# Allegro board FLASHLIGHT_V23.brd
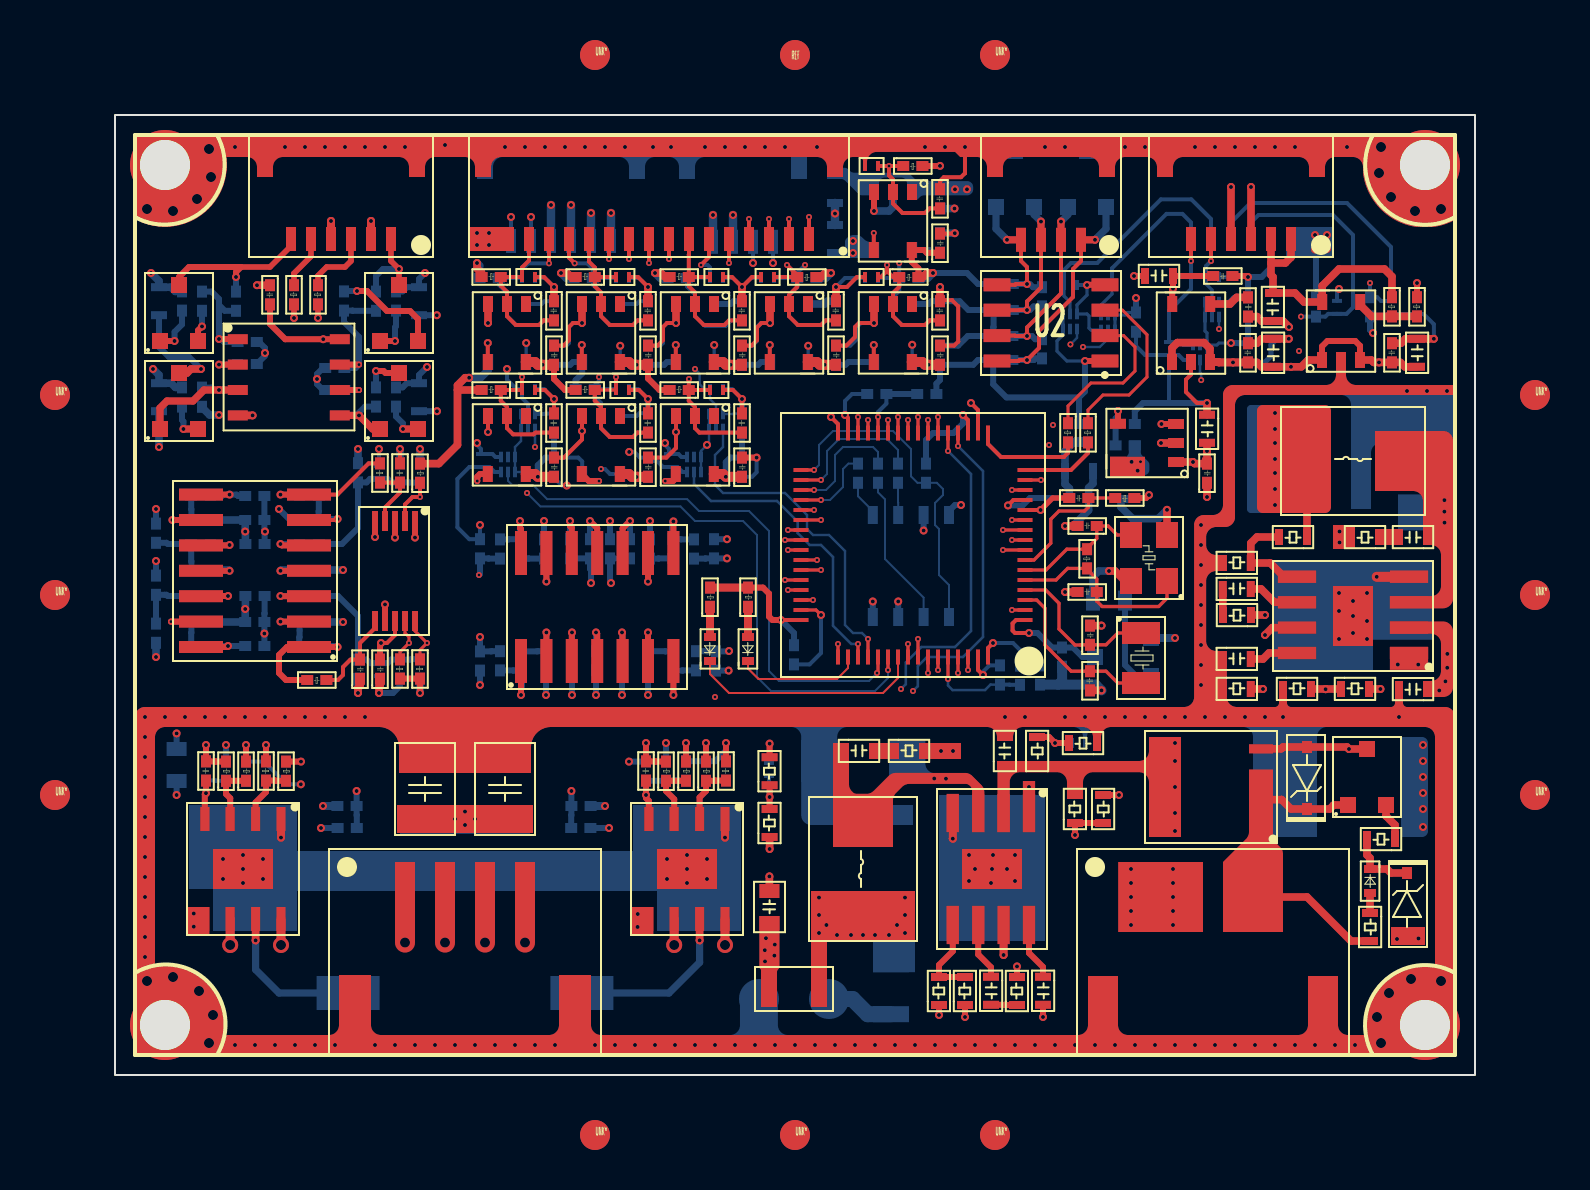
[diagram p0: board, top side]
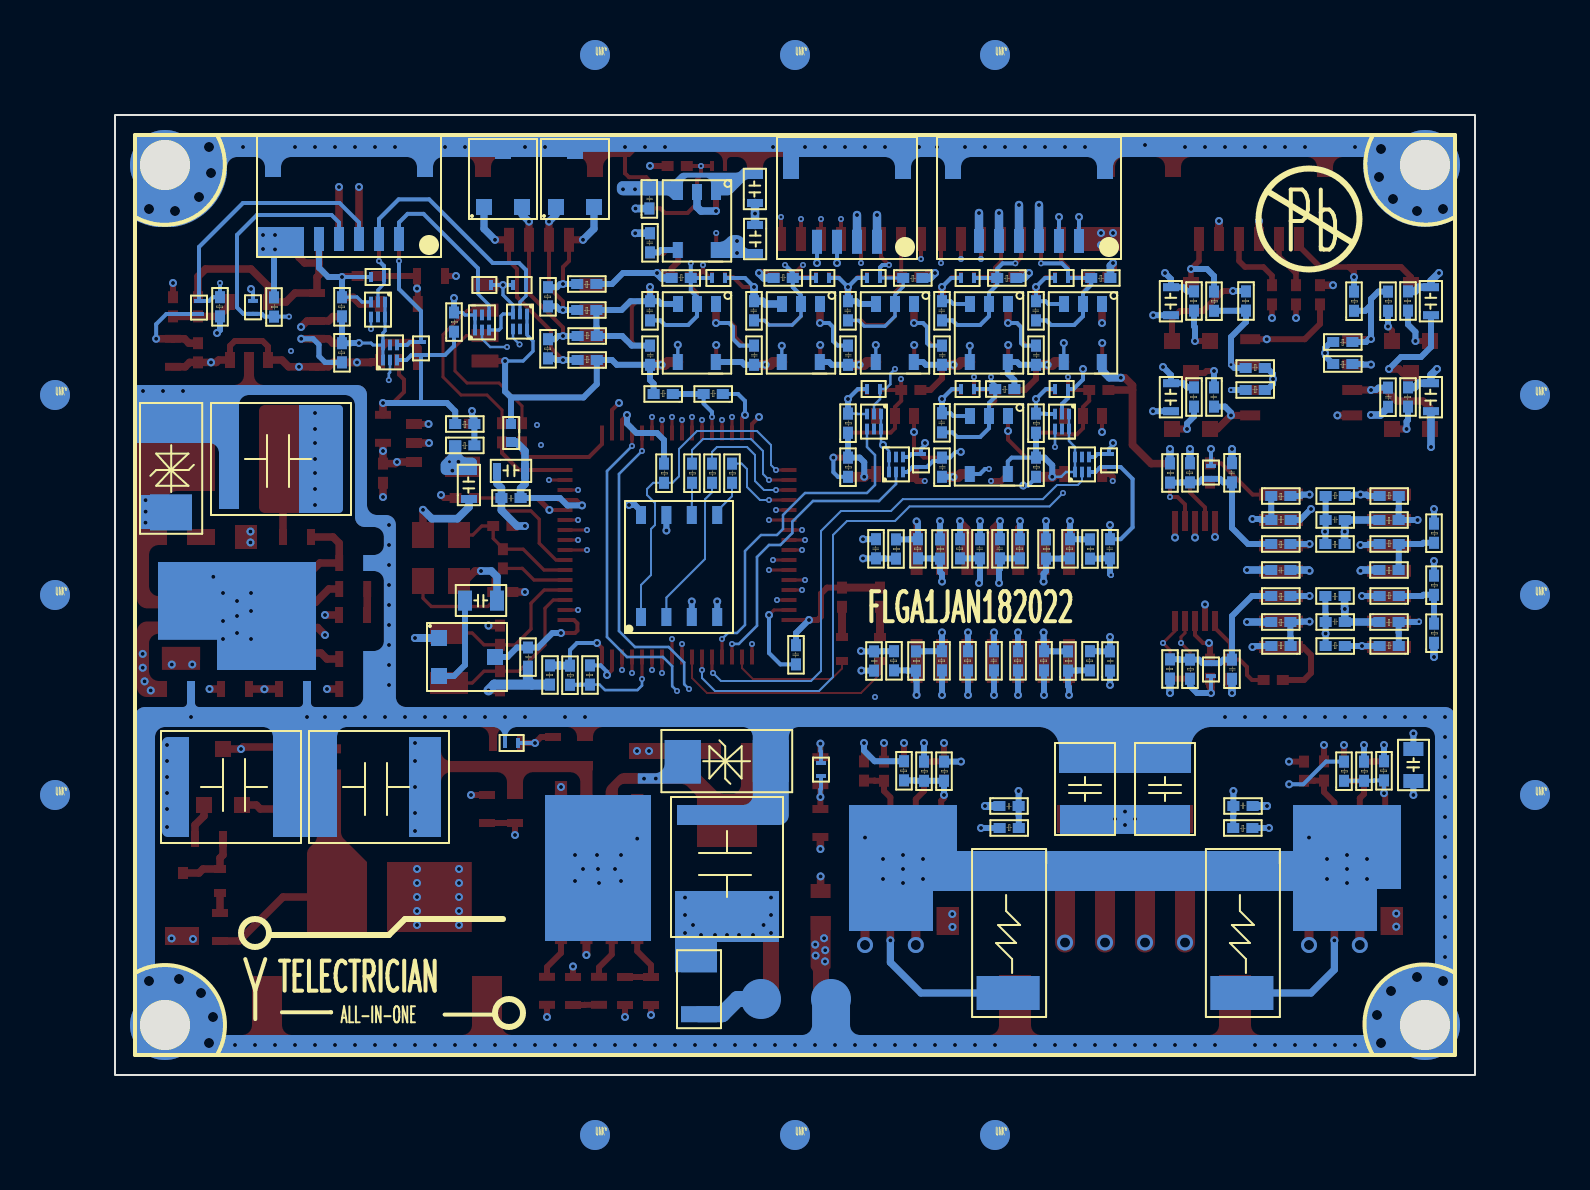
[diagram p1: board, bottom side, seen from below]

Outline 68 x 48 mm; copper layers: TOP, GND-2, SIGNAL-3, VCC-4, GND-5, SIGNAL-6, GND-7, BOTTOM. Coordinates in mm from the lower left corner of the outline.
Outline path: rectangle 0,0 68,48

## Design rules (mm)
constraint set DEFAULT: min track width 0.1

## Placement (name value [footprint] x y rotation side)
BT1  CR1220-3V  [C0805]  50.7 23.1 180 bottom
C1  0.1uF  [C0402]  41 44.3 270 top
C2  0.1uF  [C0402]  41.5 41.1 90 top
C3  10uF  [C0603]  51.4 39.55 0 top
C4  0.1uF  [C0402]  54.9 39.7 0 top
C5  0.1uF  [C0402]  7.5 39.5 270 top
C6  0.1uF  [C0402]  56.9 37.91 90 top
C7  10uF  [C0603]  58.3 37.6 90 top
C8  0.1uF  [C0402]  21.7 38.7 270 top
C9  0.1uF  [C0402]  26.4 38.7 270 top
C10  0.1uF  [C0402]  31.1 38.7 270 top
C11  0.1uF  [C0402]  35.8 38.7 270 top
C12  0.1uF  [C0402]  41 38.7 270 top
C13  0.1uF  [C0402]  56.4 36.6 270 top
C14  4.7uF  [C0603]  57.5 36.91 270 top
C15  0.1uF  [C0402]  63.6 36.6 270 top
C16  4.7uF  [C0603]  64.7 36.91 270 top
C17  0.1uF  [C0402]  22.2 35.5 90 top
C18  0.1uF  [C0402]  26.9 35.5 90 top
C19  0.1uF  [C0402]  31.6 35.5 90 top
C20  0.1uF  [C0402]  36.3 35.5 90 top
C21  0.1uF  [C0402]  41.5 35.5 90 top
C22  0.1uF  [C0402]  21.7 33.09 270 top
C23  0.1uF  [C0402]  26.4 33.09 270 top
C24  0.1uF  [C0402]  31.1 33.09 270 top
C25  4.7uF  [C0603]  54.2 33.11 270 top
C26  0.1uF  [C0402]  22.2 29.9 90 top
C27  0.1uF  [C0402]  26.9 29.9 90 top
C28  0.1uF  [C0402]  31.6 29.9 90 top
C29  0.1uF  [C0402]  14 30.59 270 top
C30  0.1uF  [C0402]  54.85 29.6 90 top
C31  0.1uF  [C0402]  47.7 28.6 0 top
C32  22pF  [C0402]  49.1 27.7 180 top
C33  10nF  [C0603]  65.7 27.3 180 top
C34  5.6nF  [C0603]  55.29 23.9 0 top
C35  22pF  [C0402]  49.1 24.4 180 top
C36  22pF  [C0402]  49 21.5 90 top
C37  0.1uF  [C0603]  55.29 20.4 0 top
C38  0.1uF  [C0402]  12.5 19.8 90 top
C39  0.1uF  [C0402]  13.5 19.8 90 top
C40  22pF  [C0402]  48.5 20.2 270 top
C41  0.1uF  [C0603]  65.7 19.7 180 top
C42  0.1uF  [C0603]  44.9 15.4 90 top
C43  10nF  [C0603]  36.4 15.8 0 top
C44  0.1uF  [C0402]  4.3 15.69 270 top
C45  0.1uF  [C0402]  26.3 15.69 270 top
C46  10uF  [C1210]  15.5 12.9 90 top
C47  10uF  [C1210]  19.5 12.9 90 top
C48  10uF  [C0805]  32.1 9.4 270 top
C49  5.6nF  [C0603]  43.4 5.01 270 top
C50  0.1uF  [C0603]  46 5.01 270 top
C51  4.7uF  [C0603]  35.6 43.5 90 bottom
C52  0.1uF  [C0402]  41.03 43.31 90 bottom
C53  10uF  [C0603]  36.4 42.6 270 bottom
C54  0.1uF  [C0402]  41.5 42.1 270 bottom
C55  10uF  [C0603]  14.8 37.89 90 bottom
C56  10uF  [C0603]  1.8 37.89 90 bottom
C57  0.1uF  [R0402]  56.9 38.9 270 bottom
C58  0.1uF  [C0402]  41.5 38.7 270 bottom
C59  0.1uF  [C0402]  36.3 38.7 270 bottom
C60  0.1uF  [C0402]  31.6 38.7 270 bottom
C61  0.1uF  [C0402]  26.9 38.7 270 bottom
C62  0.1uF  [C0402]  22.2 38.7 270 bottom
C63  0.1uF  [R0402]  50.8 37.16 90 bottom
C64  0.1uF  [R0402]  56.9 36.6 270 bottom
C65  0.1uF  [C0402]  41 35.5 90 bottom
C66  0.1uF  [C0402]  35.8 35.5 90 bottom
C67  0.1uF  [C0402]  31.1 35.5 90 bottom
C68  0.1uF  [C0402]  26.4 35.5 90 bottom
C69  0.1uF  [C0402]  21.7 35.5 90 bottom
C70  10uF  [C0603]  14.8 33.09 90 bottom
C71  0.1uF  [C0402]  13.3 34.39 270 bottom
C72  0.1uF  [C0402]  4.1 33.4 90 bottom
C73  10uF  [C0603]  1.8 33.09 90 bottom
C74  0.1uF  [C0402]  26.9 33.1 270 bottom
C75  0.1uF  [R0402]  31.1 32.1 90 bottom
C76  0.1uF  [R0402]  21.7 32.1 90 bottom
C77  47uF  [C2220]  62.3 30.8 180 bottom
C78  0.1uF  [R0402]  31.1 29.9 90 bottom
C79  0.1uF  [C0402]  26.4 29.9 90 bottom
C80  0.1uF  [R0402]  21.7 29.9 90 bottom
C81  10uF  [C0603]  49 29.8 180 bottom
C82  0.1uF  [C0402]  12.4 30.6 270 bottom
C83  10uF  [C0603]  49.9 28.7 90 bottom
C84  0.1uF  [C0402]  48.69 28.6 180 bottom
C85  0.1uF  [C0402]  6.5 28 0 bottom
C86  0.1uF  [C0402]  30.2 26.8 270 bottom
C87  0.1uF  [C0402]  25 26.8 270 bottom
C88  0.1uF  [C0402]  24 26.8 270 bottom
C89  0.1uF  [C0402]  18.5 26.8 270 bottom
C90  0.1uF  [C0402]  10.2 25 180 bottom
C91  0.1uF  [C0402]  6.5 22.9 0 bottom
C92  0.1uF  [C0402]  34.2 21.5 270 bottom
C93  0.1uF  [C0402]  47.1 20.41 90 bottom
C94  0.1uF  [C0402]  29.8 20.21 90 bottom
C95  0.1uF  [C0402]  24.3 21.2 270 bottom
C96  0.1uF  [C0402]  18 20.21 90 bottom
C97  0.1uF  [C0402]  11.9 19.8 90 bottom
C98  0.1uF  [R0402]  46.5 20.49 270 bottom
C99  10uF  [C0805]  3.7 16.5 270 bottom
C100  47uF  [C2220]  59.6 14.4 0 bottom
C101  47uF  [C2220]  57.4 14.4 180 bottom
C102  10uF  [C1210]  19.5 12.9 90 bottom
C103  10uF  [C1210]  15.5 12.9 90 bottom
C104  0.1uF  [C0402]  23.79 13.2 180 bottom
C105  0.1uF  [C0402]  11.11 13.7 0 bottom
C106  47uF  [C2220]  37.4 13 270 bottom
D1  ESD4.5V88D-C  [DFN-1006DN]  37.5 45.45 0 top
D2  ESD4.5V88D-C  [DFN-1006DN]  21 39.9 180 top
D3  ESD4.5V88D-C  [DFN-1006DN]  25.7 39.9 180 top
D4  ESD4.5V88D-C  [DFN-1006DN]  30.4 39.9 180 top
D5  ESD4.5V88D-C  [DFN-1006DN]  32.3 39.9 0 top
D6  ESD4.5V88D-C  [DFN-1006DN]  37.5 39.9 0 top
D7  ESD4.5V88D-C  [DFN-1006DN]  21 34.25 180 top
D8  ESD4.5V88D-C  [DFN-1006DN]  25.7 34.25 180 top
D9  ESD4.5V88D-C  [DFN-1006DN]  30.4 34.25 180 top
D10  BLUE  [LED0402]  30 20.8 90 top
D11  BLUE  [LED0402]  31.9 20.8 90 top
D12  BZT52C5V1  [SOD-123]  59.6 13.3 90 top
D13  RED  [LED0402]  62.5 10.2 270 top
D14  BZT52C36V  [SOD-123]  64.6 10.1 270 top
D15  ESD4.5V88D-C  [DFN-1006DN]  55.2 39.9 180 bottom
D16  ESD4.5V88D-C  [DFN-1006DN]  37.5 39.85 0 bottom
D17  ESD4.5V88D-C  [DFN-1006DN]  32.3 39.85 0 bottom
D18  ESD4.5V88D-C  [DFN-1006DN]  30.4 39.85 180 bottom
D19  ESD4.5V88D-C  [DFN-1006DN]  25.7 39.85 180 bottom
D20  ESD4.5V88D-C  [DFN-1006DN]  21 39.85 180 bottom
D21  ESD4.5V88D-C  [DFN-1006DN]  49.2 39.5 0 bottom
D22  ESD4.5V88D-C  [DFN-1006DN]  48.1 39.5 180 bottom
D23  ESD4.5V88D-C  [DFN-1006DN]  61.1 38.05 90 bottom
D24  ESD4.5V88D-C  [DFN-1006DN]  63.8 38.7 270 bottom
D25  ESD4.5V88D-C  [DFN-1006DN]  52.7 36 90 bottom
D26  ESD4.5V88D-C  [DFN-1006DN]  30.4 34.3 180 bottom
D27  ESD4.5V88D-C  [DFN-1006DN]  25.7 34.3 180 bottom
D28  ESD4.5V88D-C  [DFN-1006DN]  21 34.3 180 bottom
D29  ESD4.5V88D-C  [DFN-1006DN]  27.7 30.4 90 bottom
D30  ESD4.5V88D-C  [DFN-1006DN]  18.3 30.4 90 bottom
D31  SS35  [DO-214AC]  63.8 28 90 bottom
D32  ESD4.5V88D-C  [DFN-1006DN]  13.2 30.45 270 bottom
D33  ESD4.5V88D-C  [DFN-1006DN]  13.2 19.95 90 bottom
D34  ESD4.5V88D-C  [DFN-1006DN]  48.5 16.6 180 bottom
D35  SS35  [DO-214AC]  39.74 14.3 180 bottom
D36  ESD4.5V88D-C  [DFN-1006DN]  32.7 15.6 270 bottom
J1  Header1x6  [SMD-SH1D0-6P-HOR]  11.3 42.5 180 top
J2  Header1x16  [SMD-SH1D0-16P-HOR]  27.2 42.5 180 top
J3  Header1x4  [SMD-SH1D0-4P-HOR]  46.8 42.5 180 top
J4  Header1x6  [SMD-SH1D0-6P-HOR]  56.3 42.5 180 top
J5  Header1x4  [SMD-PH2D0-4P-HOR]  17.5 7 0 top
J6  Header1x4  [SMD-PH2D0-4P-HOR]  54.9 7 0 top
J7  Header1x6  [SMD-SH1D0-6P-HOR]  56.3 42.5 0 bottom
J8  Header1x4  [SMD-SH1D0-4P-HOR]  31.4 42.4 0 bottom
J9  Header1x6  [SMD-SH1D0-6P-HOR]  22.3 42.4 0 bottom
L1  10uH  [IND-5D7X5D2X1D8]  64 30.7 180 top
L2  10uH  [IND-5D7X5D2X1D8]  37.4 12.4 270 top
L3  1uH  [L1206]  35.2 4.3 180 top
L4  BLM15BD182SN1D  [FB0402]  48.44 32.6 270 bottom
L5  1uH  [L1206]  38.8 5.54 270 bottom
NOREF  -  []  54.2 31.51 0 top
NOREF#2  -  []  38.9 44.15 0 top
NOREF#3  -  []  27.27 40.29 0 top
NOREF#4  -  []  30.96 36.93 0 top
NOREF#5  -  []  27.04 31.67 90 top
NOREF#6  -  []  12.86 29.16 0 top
NOREF#7  -  []  29 38.55 0 top
NOREF#8  -  []  40.63 39.46 90 top
NOREF#9  -  []  22.57 33.86 90 top
NOREF#10  -  []  6.16 14.25 90 top
NOREF#11  -  []  29.66 21.64 0 top
NOREF#12  -  []  18.05 35.5 90 top
NOREF#13  -  []  32.76 35.65 90 top
NOREF#14  -  []  67.3 27.3 90 top
NOREF#15  -  []  38.76 29.15 90 top
NOREF#16  -  []  22.34 37.27 90 top
NOREF#17  -  []  47.67 23.76 90 top
NOREF#18  -  []  49.57 31.09 90 top
NOREF#19  -  []  50.3 35 90 top
NOREF#20  -  []  26.26 36.93 0 top
NOREF#21  -  []  30.14 22.95 90 top
NOREF#22  -  []  3.74 37.76 90 top
NOREF#23  -  []  18.65 38.55 0 top
NOREF#24  -  []  30.55 35.5 90 top
NOREF#25  -  []  47.26 28.46 0 top
NOREF#26  -  []  26.36 25.36 90 top
NOREF#27  -  []  5.23 21.06 90 top
NOREF#28  -  []  46.51 15.4 90 top
NOREF#29  -  []  10.67 11.96 0 top
NOREF#30  -  []  28.24 25.37 90 top
NOREF#31  -  []  21.56 35.05 90 top
NOREF#32  -  []  3.35 26.94 0 top
NOREF#33  -  []  48.22 24.87 90 top
NOREF#34  -  []  43.47 37.86 90 top
NOREF#35  -  []  64.7 35.31 0 top
NOREF#36  -  []  35.66 36.93 0 top
NOREF#37  -  []  30.96 36.93 0 top
NOREF#38  -  []  25.24 30.05 90 top
NOREF#39  -  []  3.36 27.36 0 top
NOREF#40  -  []  55.29 21.21 0 top
NOREF#41  -  []  26.14 25.37 90 top
NOREF#42  -  []  11.76 29.17 0 top
NOREF#43  -  []  6.16 16.13 0 top
NOREF#44  -  []  50 30.05 90 top
NOREF#45  -  []  35.53 39.51 90 top
NOREF#46  -  []  8.77 22.26 90 top
NOREF#47  -  []  44.64 19.06 90 top
NOREF#48  -  []  41.67 44.74 90 top
NOREF#49  -  []  57.49 37.6 90 top
NOREF#50  -  []  40.86 36.93 0 top
NOREF#51  -  []  3.36 22.26 0 top
NOREF#52  -  []  19.64 19.77 90 top
NOREF#53  -  []  40.9 42.86 90 top
NOREF#54  -  []  55.3 22.59 0 top
NOREF#55  -  []  27.46 25.37 0 top
NOREF#56  -  []  14.44 37.76 90 top
NOREF#57  -  []  27.45 29.9 0 top
NOREF#58  -  []  17.87 33.86 90 top
NOREF#59  -  []  14.8 39.49 0 top
NOREF#60  -  []  40.86 37.27 0 top
NOREF#61  -  []  33.65 40.24 0 top
NOREF#62  -  []  30.96 37.27 0 top
NOREF#63  -  []  44.1 40.2 0 top
NOREF#64  -  []  3.7 14.5 90 top
NOREF#65  -  []  33.65 39.51 0 top
NOREF#66  -  []  53 39.55 90 top
NOREF#67  -  []  44.09 17 0 top
NOREF#68  -  []  30.96 31.66 0 top
NOREF#69  -  []  41.53 33.66 90 top
NOREF#70  -  []  30.96 31.33 0 top
NOREF#71  -  []  50.66 38.59 0 top
NOREF#72  -  []  21.56 31.65 90 top
NOREF#73  -  []  46.81 3.41 90 top
NOREF#74  -  []  48.36 22.93 0 top
NOREF#75  -  []  57.04 37.46 90 top
NOREF#76  -  []  27.94 14.25 90 top
NOREF#77  -  []  19.86 25.37 0 top
NOREF#78  -  []  5.66 37.75 90 top
NOREF#79  -  []  9.76 38.07 0 top
NOREF#80  -  []  8.16 16.13 0 top
NOREF#81  -  []  32.1 7.4 90 top
NOREF#82  -  []  44.69 3.4 90 top
NOREF#83  -  []  0 -7.51 0 top
NOREF#84  -  []  27.17 39.46 90 top
NOREF#85  -  []  68 -7.81 0 top
NOREF#86  -  []  28.94 14.27 90 top
NOREF#87  -  []  5.23 23.56 90 top
NOREF#88  -  []  54.21 31.03 90 top
NOREF#89  -  []  17.86 21.64 0 top
NOREF#90  -  []  5.67 36.26 0 top
NOREF#91  -  []  31.74 29.45 90 top
NOREF#92  -  []  23.35 32.95 0 top
NOREF#93  -  []  39.03 33.66 90 top
NOREF#94  -  []  13.86 29.16 90 top
NOREF#95  -  []  32.15 35.5 0 top
NOREF#96  -  []  40.16 29.15 90 top
NOREF#97  -  []  56.33 39.56 90 top
NOREF#98  -  []  22.57 40.29 0 top
NOREF#99  -  []  8.94 14.25 90 top
NOREF#100  -  []  30.96 37.27 0 top
NOREF#101  -  []  36.41 43.5 90 top
NOREF#102  -  []  10.64 21.06 90 top
NOREF#103  -  []  37.35 35.5 0 top
NOREF#104  -  []  63.46 35.17 0 top
NOREF#105  -  []  21.56 31.33 0 top
NOREF#106  -  []  9.15 19.36 0 top
NOREF#107  -  []  52.85 35.65 0 top
NOREF#108  -  []  36.76 31.03 0 top
NOREF#109  -  []  10.05 35.74 0 top
NOREF#110  -  []  2.96 32.96 0 top
NOREF#111  -  []  6.05 23.04 0 top
NOREF#112  -  []  23.14 25.37 90 top
NOREF#113  -  []  8.77 26.16 0 top
NOREF#114  -  []  38.75 40.24 0 top
NOREF#115  -  []  40.79 5 0 top
NOREF#116  -  []  -5 -5 90 top
NOREF#117  -  []  37.15 34.44 0 top
NOREF#118  -  []  37.96 35.65 90 top
NOREF#119  -  []  21.56 31.66 90 top
NOREF#120  -  []  6.16 16.13 0 top
NOREF#121  -  []  28.94 14.25 90 top
NOREF#122  -  []  5.94 14.25 90 top
NOREF#123  -  []  48.36 18.77 0 top
NOREF#124  -  []  3.36 22.26 90 top
NOREF#125  -  []  5.16 14.25 90 top
NOREF#126  -  []  57.5 35.31 0 top
NOREF#127  -  []  4.94 14.27 90 top
NOREF#128  -  []  15.61 37.89 90 top
NOREF#129  -  []  32.75 38.55 0 top
NOREF#130  -  []  57.04 35.17 90 top
NOREF#131  -  []  30.16 14.26 90 top
NOREF#132  -  []  21.56 37.27 90 top
NOREF#133  -  []  22.57 33.91 90 top
NOREF#134  -  []  62.85 35.6 90 top
NOREF#135  -  []  7.93 28.56 90 top
NOREF#136  -  []  11.8 32.4 90 top
NOREF#137  -  []  47.67 27.06 90 top
NOREF#138  -  []  17.77 39.46 0 top
NOREF#139  -  []  52.85 35.65 90 top
NOREF#140  -  []  64.71 37.47 90 top
NOREF#141  -  []  47.4 29.8 90 top
NOREF#142  -  []  23.66 19.77 0 top
NOREF#143  -  []  56.1 22.3 90 top
NOREF#144  -  []  63.8 32.6 0 top
NOREF#145  -  []  41.64 40.65 90 top
NOREF#146  -  []  8.56 38.07 0 top
NOREF#147  -  []  45 5.01 90 top
NOREF#148  -  []  2.5 2.5 90 top
NOREF#149  -  []  11.84 37.76 90 top
NOREF#150  -  []  47.25 28.46 0 top
NOREF#151  -  []  22.75 35.5 90 top
NOREF#152  -  []  6.05 21.84 0 top
NOREF#153  -  []  40.83 45.06 90 top
NOREF#154  -  []  22.75 35.5 0 top
NOREF#155  -  []  33.35 7.4 90 top
NOREF#156  -  []  3.96 32.95 90 top
NOREF#157  -  []  21.56 33.53 0 top
NOREF#158  -  []  42.09 5 0 top
NOREF#159  -  []  7.93 27.36 90 top
NOREF#160  -  []  18.05 29.9 0 top
NOREF#161  -  []  25.74 19.77 90 top
NOREF#162  -  []  15.64 29.15 90 top
NOREF#163  -  []  26.26 19.77 0 top
NOREF#164  -  []  62.5 11.39 0 top
NOREF#165  -  []  18.64 25.37 90 top
NOREF#166  -  []  46.74 35.37 90 top
NOREF#167  -  []  10.64 27.36 90 top
NOREF#168  -  []  52.25 38.7 0 top
NOREF#169  -  []  26.26 31.67 0 top
NOREF#170  -  []  32.32 13.4 0 top
NOREF#171  -  []  40.45 41.1 90 top
NOREF#172  -  []  17.86 25.37 0 top
NOREF#173  -  []  32.04 22.95 90 top
NOREF#174  -  []  51.43 28.46 90 top
NOREF#175  -  []  6.94 14.25 90 top
NOREF#176  -  []  27.45 35.5 0 top
NOREF#177  -  []  61.7 26.49 0 top
NOREF#178  -  []  47.26 31.17 90 top
NOREF#179  -  []  59.9 18.9 90 top
NOREF#180  -  []  40.63 39.51 90 top
NOREF#181  -  []  2.45 14.5 90 top
NOREF#182  -  []  30.96 31.33 0 top
NOREF#183  -  []  46.64 19.06 90 top
NOREF#184  -  []  14.8 34.69 0 top
NOREF#185  -  []  22.36 13.06 90 top
NOREF#186  -  []  65.51 35.31 90 top
NOREF#187  -  []  1.66 25.43 0 top
NOREF#188  -  []  61.2 19.71 0 top
NOREF#189  -  []  38.75 39.51 0 top
NOREF#190  -  []  34 0 90 top
NOREF#191  -  []  20.54 30.05 90 top
NOREF#192  -  []  5.23 26.16 90 top
NOREF#193  -  []  46.74 35.37 90 top
NOREF#194  -  []  26.26 31.33 0 top
NOREF#195  -  []  21.56 37.27 0 top
NOREF#196  -  []  22.57 33.91 0 top
NOREF#197  -  []  40.86 42.87 90 top
NOREF#198  -  []  20.64 25.37 90 top
NOREF#199  -  []  27.27 39.51 90 top
NOREF#200  -  []  8.56 38.07 90 top
NOREF#201  -  []  14.44 32.96 90 top
NOREF#202  -  []  1.8 39.49 0 top
NOREF#203  -  []  29 32.95 0 top
NOREF#204  -  []  5.66 39.63 0 top
NOREF#205  -  []  58.1 26.49 90 top
NOREF#206  -  []  29.94 35.65 90 top
NOREF#207  -  []  24.3 32.95 0 top
NOREF#208  -  []  62.35 6.6 0 top
NOREF#209  -  []  8.76 21.84 0 top
NOREF#210  -  []  2.96 37.76 0 top
NOREF#211  -  []  11.76 21.23 0 top
NOREF#212  -  []  26.26 31.66 90 top
NOREF#213  -  []  22.46 19.77 0 top
NOREF#214  -  []  26.26 31.66 90 top
NOREF#215  -  []  28.56 27.24 0 top
NOREF#216  -  []  63.46 37.47 90 top
NOREF#217  -  []  11.93 34.96 90 top
NOREF#218  -  []  8.77 23.56 90 top
NOREF#219  -  []  18.86 27.24 0 top
NOREF#220  -  []  5.16 16.13 0 top
NOREF#221  -  []  2.5 45.5 0 top
NOREF#222  -  []  44.69 5 0 top
NOREF#223  -  []  26.16 14.26 0 top
NOREF#224  -  []  49.57 31.09 0 top
NOREF#225  -  []  12.86 21.23 0 top
NOREF#226  -  []  45.33 35.36 90 top
NOREF#227  -  []  1.66 23.03 0 top
NOREF#228  -  []  3.96 37.75 90 top
NOREF#229  -  []  30.96 37.27 90 top
NOREF#230  -  []  38 15.8 90 top
NOREF#231  -  []  30.16 14.26 0 top
NOREF#232  -  []  10.05 34.64 0 top
NOREF#233  -  []  14.86 19.36 0 top
NOREF#234  -  []  22.36 13.06 0 top
NOREF#235  -  []  47.26 31.17 0 top
NOREF#236  -  []  50 33.15 0 top
NOREF#237  -  []  66.59 28 90 top
NOREF#238  -  []  60.35 35.75 90 top
NOREF#239  -  []  19.6 32.95 0 top
NOREF#240  -  []  24.36 25.37 0 top
NOREF#241  -  []  49.9 30.3 0 top
NOREF#242  -  []  20.54 35.65 90 top
NOREF#243  -  []  6.06 26.16 0 top
NOREF#244  -  []  28.16 14.27 0 top
NOREF#245  -  []  49.57 32.16 90 top
NOREF#246  -  []  29.66 19.76 90 top
NOREF#247  -  []  48.26 31.17 90 top
NOREF#248  -  []  75.42 0 0 top
NOREF#249  -  []  8.77 24.86 0 top
NOREF#250  -  []  21.56 36.93 0 top
NOREF#251  -  []  30.96 33.53 0 top
NOREF#252  -  []  7.93 22.26 90 top
NOREF#253  -  []  56.26 35.17 0 top
NOREF#254  -  []  33.56 20.07 0 top
NOREF#255  -  []  56.89 25.2 90 top
NOREF#256  -  []  63.16 6.6 90 top
NOREF#257  -  []  26.26 37.27 90 top
NOREF#258  -  []  43.4 5.82 0 top
NOREF#259  -  []  18.05 35.5 0 top
NOREF#260  -  []  27.17 39.46 0 top
NOREF#261  -  []  37.35 41.1 90 top
NOREF#262  -  []  32.32 14.39 90 top
NOREF#263  -  []  37.76 31.03 0 top
NOREF#264  -  []  29.94 14.25 90 top
NOREF#265  -  []  3.96 34.83 0 top
NOREF#266  -  []  25.14 25.37 90 top
NOREF#267  -  []  5.23 28.56 90 top
NOREF#268  -  []  28.06 35.65 90 top
NOREF#269  -  []  14.64 29.17 90 top
NOREF#270  -  []  50.7 21.1 90 top
NOREF#271  -  []  26.26 36.93 0 top
NOREF#272  -  []  35.66 37.27 90 top
NOREF#273  -  []  75.29 48 0 top
NOREF#274  -  []  6.05 28.14 0 top
NOREF#275  -  []  31.74 35.05 90 top
NOREF#276  -  []  27.04 29.45 90 top
NOREF#277  -  []  21.56 36.93 0 top
NOREF#278  -  []  46.96 19.95 90 top
NOREF#279  -  []  24.44 19.77 90 top
NOREF#280  -  []  55.3 22.59 90 top
NOREF#281  -  []  23.14 25.37 90 top
NOREF#282  -  []  22.57 39.51 90 top
NOREF#283  -  []  40.79 3.4 90 top
NOREF#284  -  []  56.89 20.4 90 top
NOREF#285  -  []  37.35 41.1 0 top
NOREF#286  -  []  12.86 29.16 90 top
NOREF#287  -  []  55.01 31.51 90 top
NOREF#288  -  []  21.16 19.77 0 top
NOREF#289  -  []  22.34 29.45 90 top
NOREF#290  -  []  41.64 35.05 90 top
NOREF#291  -  []  1.8 34.69 0 top
NOREF#292  -  []  56.26 35.17 90 top
NOREF#293  -  []  21.56 31.33 0 top
NOREF#294  -  []  6.05 29.34 0 top
NOREF#295  -  []  56.89 19.71 90 top
NOREF#296  -  []  5.67 35.16 90 top
NOREF#297  -  []  37.95 38.55 0 top
NOREF#298  -  []  32.15 35.5 0 top
NOREF#299  -  []  17.87 40.29 0 top
NOREF#300  -  []  27.45 29.9 90 top
NOREF#301  -  []  46.96 21.84 0 top
NOREF#302  -  []  44.1 35.7 0 top
NOREF#303  -  []  58.3 19.71 0 top
NOREF#304  -  []  49.14 21.05 90 top
NOREF#305  -  []  30.96 31.65 90 top
NOREF#306  -  []  13.44 32.96 90 top
NOREF#307  -  []  1.66 23.55 90 top
NOREF#308  -  []  44.86 19.05 90 top
NOREF#309  -  []  44.1 35.7 90 top
NOREF#310  -  []  35.66 35.05 90 top
NOREF#311  -  []  22.34 35.05 90 top
NOREF#312  -  []  14.86 31.03 0 top
NOREF#313  -  []  3.36 27.36 90 top
NOREF#314  -  []  48.26 31.17 0 top
NOREF#315  -  []  35.59 41 0 top
NOREF#316  -  []  19.96 21.64 0 top
NOREF#317  -  []  39.65 34.44 0 top
NOREF#318  -  []  17.77 39.46 90 top
NOREF#319  -  []  13.86 19.35 90 top
NOREF#320  -  []  3.35 21.84 0 top
NOREF#321  -  []  43.47 39.16 0 top
NOREF#322  -  []  13.86 21.23 0 top
NOREF#323  -  []  29.16 16.13 0 top
NOREF#324  -  []  19.6 38.55 0 top
NOREF#325  -  []  5.67 36.26 90 top
NOREF#326  -  []  10.66 13.84 0 top
NOREF#327  -  []  35.66 37.27 0 top
NOREF#328  -  []  42.09 3.4 90 top
NOREF#329  -  []  45.7 15.4 0 top
NOREF#330  -  []  5.67 35.16 0 top
NOREF#331  -  []  49.57 32.16 0 top
NOREF#332  -  []  13.86 29.17 0 top
NOREF#333  -  []  23.36 35.65 90 top
NOREF#334  -  []  37.96 41.25 90 top
NOREF#335  -  []  60.35 35.75 0 top
NOREF#336  -  []  46.74 37.97 90 top
NOREF#337  -  []  30.96 35.05 90 top
NOREF#338  -  []  35.14 14.3 90 top
NOREF#339  -  []  49.55 28.46 0 top
NOREF#340  -  []  65.7 28.11 0 top
NOREF#341  -  []  15.61 33.09 90 top
NOREF#342  -  []  47.4 30.61 0 top
NOREF#343  -  []  8.77 22.26 0 top
NOREF#344  -  []  21.94 19.77 90 top
NOREF#345  -  []  23.36 25.37 0 top
NOREF#346  -  []  31.74 37.27 90 top
NOREF#347  -  []  4.16 14.27 0 top
NOREF#348  -  []  7.36 38.07 0 top
NOREF#349  -  []  22.75 29.9 0 top
NOREF#350  -  []  17.87 39.51 90 top
NOREF#351  -  []  61.7 26.49 90 top
NOREF#352  -  []  8.77 28.56 90 top
NOREF#353  -  []  14.86 19.36 0 top
NOREF#354  -  []  18.86 19.77 0 top
NOREF#355  -  []  6.06 23.56 0 top
NOREF#356  -  []  9.76 38.07 90 top
NOREF#357  -  []  40.86 42.87 0 top
NOREF#358  -  []  43.45 37.34 0 top
NOREF#359  -  []  18.66 35.65 90 top
NOREF#360  -  []  55.29 26.01 0 top
NOREF#361  -  []  59.75 38.8 0 top
NOREF#362  -  []  29.44 19.77 90 top
NOREF#363  -  []  35.66 37.27 0 top
NOREF#364  -  []  45.33 36.56 90 top
NOREF#365  -  []  40.45 35.5 90 top
NOREF#366  -  []  17.86 19.76 90 top
NOREF#367  -  []  38.9 16.61 0 top
NOREF#368  -  []  23.35 38.55 0 top
NOREF#369  -  []  15.64 19.36 90 top
NOREF#370  -  []  24.3 38.55 0 top
NOREF#371  -  []  13.86 19.36 90 top
NOREF#372  -  []  23.24 19.77 90 top
NOREF#373  -  []  8.77 24.86 90 top
NOREF#374  -  []  27.16 14.25 90 top
NOREF#375  -  []  40.86 36.93 0 top
NOREF#376  -  []  41.64 40.67 90 top
NOREF#377  -  []  6.06 26.16 0 top
NOREF#378  -  []  58.1 26.49 0 top
NOREF#379  -  []  13.64 19.35 90 top
NOREF#380  -  []  63.14 37.47 90 top
NOREF#381  -  []  46 3.41 0 top
NOREF#382  -  []  3.36 24.86 0 top
NOREF#383  -  []  2.61 34.69 0 top
NOREF#384  -  []  56.26 35.17 0 top
NOREF#385  -  []  22.75 29.9 0 top
NOREF#386  -  []  35.59 41 90 top
NOREF#387  -  []  40.16 31.03 0 top
NOREF#388  -  []  50.66 36.7 90 top
NOREF#389  -  []  47.26 28.46 90 top
NOREF#390  -  []  26.26 35.05 90 top
NOREF#391  -  []  49.45 21.1 90 top
NOREF#392  -  []  28.66 19.77 0 top
NOREF#393  -  []  26.26 37.27 0 top
NOREF#394  -  []  21.56 37.27 0 top
NOREF#395  -  []  12.54 29.17 90 top
NOREF#396  -  []  13.86 29.16 0 top
NOREF#397  -  []  40.86 35.05 90 top
NOREF#398  -  []  22.75 35.5 0 top
NOREF#399  -  []  32.32 15.99 0 top
NOREF#400  -  []  21.56 29.45 90 top
NOREF#401  -  []  27.27 33.86 90 top
NOREF#402  -  []  13.66 32.96 0 top
NOREF#403  -  []  25.85 35.5 90 top
NOREF#404  -  []  22.47 39.46 0 top
NOREF#405  -  []  44.09 15.4 90 top
NOREF#406  -  []  27.56 19.76 90 top
NOREF#407  -  []  62.5 11.39 90 top
NOREF#408  -  []  17.87 34.64 0 top
NOREF#409  -  []  49 12.5 0 top
NOREF#410  -  []  26.16 16.13 0 top
NOREF#411  -  []  18.86 25.36 90 top
NOREF#412  -  []  64.1 18.89 90 top
NOREF#413  -  []  64.71 37.47 0 top
NOREF#414  -  []  19.96 19.76 90 top
NOREF#415  -  []  8.77 26.16 90 top
NOREF#416  -  []  1.66 21.15 90 top
NOREF#417  -  []  27.04 35.05 90 top
NOREF#418  -  []  3.74 32.96 90 top
NOREF#419  -  []  21.56 31.66 0 top
NOREF#420  -  []  37.95 44.15 0 top
NOREF#421  -  []  53.05 30.65 90 top
NOREF#422  -  []  57.04 37.47 90 top
NOREF#423  -  []  25.85 29.9 90 top
NOREF#424  -  []  36.4 16.61 0 top
NOREF#425  -  []  35.6 45.1 0 top
NOREF#426  -  []  24.14 25.37 90 top
NOREF#427  -  []  12.54 13.06 90 top
NOREF#428  -  []  23.36 30.05 90 top
NOREF#429  -  []  5.16 16.13 0 top
NOREF#430  -  []  11.06 37.76 0 top
NOREF#431  -  []  41.64 37.27 90 top
NOREF#432  -  []  2.61 37.89 90 top
NOREF#433  -  []  22.47 39.46 90 top
NOREF#434  -  []  8.76 28.14 0 top
NOREF#435  -  []  24.23 11.96 90 top
NOREF#436  -  []  3.36 24.86 90 top
NOREF#437  -  []  31.26 24.83 0 top
NOREF#438  -  []  26.16 14.25 90 top
NOREF#439  -  []  18.05 29.9 90 top
NOREF#440  -  []  40.86 37.27 90 top
NOREF#441  -  []  18.05 35.5 0 top
NOREF#442  -  []  34.34 20.07 90 top
NOREF#443  -  []  3.35 29.34 0 top
NOREF#444  -  []  13.86 19.36 0 top
NOREF#445  -  []  7.16 14.26 90 top
NOREF#446  -  []  14.86 29.16 90 top
NOREF#447  -  []  22.35 12.74 0 top
NOREF#448  -  []  14.86 19.36 90 top
NOREF#449  -  []  37.35 35.5 0 top
NOREF#450  -  []  43.45 36.14 0 top
NOREF#451  -  []  10.67 11.96 90 top
NOREF#452  -  []  40.86 37.27 0 top
NOREF#453  -  []  27.45 35.5 90 top
NOREF#454  -  []  13.66 37.76 0 top
NOREF#455  -  []  49.13 28.46 90 top
NOREF#456  -  []  27.16 16.13 0 top
NOREF#457  -  []  53.05 30.65 90 top
NOREF#458  -  []  11.93 33.86 90 top
NOREF#459  -  []  48.36 18.77 90 top
NOREF#460  -  []  58.31 35.31 90 top
NOREF#461  -  []  33.7 38.55 0 top
NOREF#462  -  []  47.67 24.54 0 top
NOREF#463  -  []  7.16 14.26 90 top
NOREF#464  -  []  21.06 25.36 90 top
NOREF#465  -  []  55.29 22.3 0 top
NOREF#466  -  []  35.14 17.09 0 top
NOREF#467  -  []  37.35 41.1 0 top
NOREF#468  -  []  35.53 39.46 90 top
NOREF#469  -  []  35.25 35.5 90 top
NOREF#470  -  []  36.76 29.15 90 top
NOREF#471  -  []  50.71 28.7 90 top
NOREF#472  -  []  26.26 37.27 0 top
NOREF#473  -  []  26.26 31.33 0 top
NOREF#474  -  []  34.64 35.65 90 top
NOREF#475  -  []  7.93 21.06 90 top
NOREF#476  -  []  11.76 19.35 90 top
NOREF#477  -  []  12.66 37.75 90 top
NOREF#478  -  []  56.26 37.47 0 top
NOREF#479  -  []  47.67 27.84 0 top
NOREF#480  -  []  32.32 11.8 90 top
NOREF#481  -  []  62.36 37.47 0 top
NOREF#482  -  []  35.66 36.93 0 top
NOREF#483  -  []  48.22 24.87 0 top
NOREF#484  -  []  6.06 23.56 90 top
NOREF#485  -  []  3.96 39.63 0 top
NOREF#486  -  []  27.56 21.64 0 top
NOREF#487  -  []  63.46 37.47 0 top
NOREF#488  -  []  1.66 28.03 0 top
NOREF#489  -  []  43.47 39.16 90 top
NOREF#490  -  []  47.6 16.19 0 top
NOREF#491  -  []  47.6 16.19 90 top
NOREF#492  -  []  57.49 39.2 0 top
NOREF#493  -  []  8.77 28.56 0 top
NOREF#494  -  []  36.44 35.05 90 top
NOREF#495  -  []  8.77 23.56 0 top
NOREF#496  -  []  26.16 14.26 90 top
NOREF#497  -  []  54.45 39.56 0 top
NOREF#498  -  []  39.84 35.65 90 top
NOREF#499  -  []  56.89 18.9 90 top
NOREF#500  -  []  12.64 19.35 90 top
NOREF#501  -  []  64.1 18.89 0 top
NOREF#502  -  []  30.96 29.45 90 top
NOREF#503  -  []  32.15 35.5 90 top
NOREF#504  -  []  1.66 26.15 90 top
NOREF#505  -  []  43.47 37.86 0 top
NOREF#506  -  []  44.86 20.93 0 top
NOREF#507  -  []  0 24 0 top
NOREF#508  -  []  12.66 39.63 0 top
NOREF#509  -  []  30.34 25.37 90 top
NOREF#510  -  []  63.46 35.17 90 top
NOREF#511  -  []  27.04 19.77 90 top
NOREF#512  -  []  27.27 34.64 0 top
NOREF#513  -  []  28.56 25.36 90 top
NOREF#514  -  []  7.36 38.07 90 top
NOREF#515  -  []  4.16 14.26 0 top
NOREF#516  -  []  54.99 29.15 90 top
NOREF#517  -  []  12.66 32.96 0 top
NOREF#518  -  []  22.57 34.64 0 top
NOREF#519  -  []  26.36 27.24 0 top
NOREF#520  -  []  40.86 42.53 90 top
NOREF#521  -  []  37.35 35.5 90 top
NOREF#522  -  []  38.76 31.03 0 top
NOREF#523  -  []  43.86 19.06 0 top
NOREF#524  -  []  30.96 31.66 90 top
NOREF#525  -  []  29.94 30.05 90 top
NOREF#526  -  []  59.66 39.34 0 top
NOREF#527  -  []  3.35 24.34 0 top
NOREF#528  -  []  -5 53 0 top
NOREF#529  -  []  22.75 29.9 90 top
NOREF#530  -  []  45.86 19.06 0 top
NOREF#531  -  []  27.16 16.13 0 top
NOREF#532  -  []  21.06 27.24 0 top
NOREF#533  -  []  25.36 25.37 0 top
NOREF#534  -  []  36.44 37.27 90 top
NOREF#535  -  []  5.6 32.4 0 top
NOREF#536  -  []  47.94 31.6 90 top
NOREF#537  -  []  47.59 12.5 90 top
NOREF#538  -  []  59.66 37.46 90 top
NOREF#539  -  []  26.26 29.45 90 top
NOREF#540  -  []  53 40.36 90 top
NOREF#541  -  []  11.86 21.23 0 top
NOREF#542  -  []  45.96 37.97 0 top
NOREF#543  -  []  4.16 14.26 90 top
NOREF#544  -  []  25.24 35.65 90 top
NOREF#545  -  []  29.36 24.83 90 top
NOREF#546  -  []  11.03 19.36 90 top
NOREF#547  -  []  24.96 19.77 0 top
NOREF#548  -  []  56.26 39.34 0 top
NOREF#549  -  []  29.56 25.37 0 top
NOREF#550  -  []  37.76 29.15 90 top
NOREF#551  -  []  28.16 16.13 0 top
NOREF#552  -  []  55.35 35.5 90 top
NOREF#553  -  []  27.04 37.27 90 top
NOREF#554  -  []  40.86 40.67 0 top
NOREF#555  -  []  28.05 38.55 0 top
NOREF#556  -  []  49.81 12.5 90 top
NOREF#557  -  []  14.86 31.04 0 top
NOREF#558  -  []  47.59 14.1 0 top
NOREF#559  -  []  27.45 35.5 0 top
NOREF#560  -  []  21.15 35.5 90 top
NOREF#561  -  []  38.9 38.55 0 top
NOREF#562  -  []  39.84 41.25 90 top
NOREF#563  -  []  62.8 18.9 90 top
NOREF#564  -  []  38.95 45.06 0 top
NOREF#565  -  []  40.5 15.8 90 top
Q1  S8550  [SOT-23-3]  3.2 38.1 0 top
Q2  S8550  [SOT-23-3]  14.2 38.1 0 top
Q3  2SB1116  [SOT-23-3]  62.6 14.9 0 top
Q4  NCE55P05S  [SOP-8]  52.3 12.5 90 top
Q5  BAT54CW  [SOT-323]  50.4 20.9 270 bottom
R1  10K  [R0402]  39.4 45.2 0 top
R2  10K  [R0402]  19.3 40.15 180 top
R3  10K  [R0402]  24 40.15 180 top
R4  10K  [R0402]  28.7 40.15 180 top
R5  10K  [R0402]  34.1 39.65 0 top
R6  10K  [R0402]  39.2 39.65 0 top
R7  0  [R0402]  8.7 39.5 270 top
R8  0  [R0402]  9.9 39.5 270 top
R9  147K  [R0402]  63.6 38.9 270 top
R10  47K  [R0402]  64.85 38.9 270 top
R11  10K  [R0402]  19.3 34.5 180 top
R12  10K  [R0402]  24 34.5 180 top
R13  10K  [R0402]  28.7 34.5 180 top
R14  0  [R0402]  47.4 32.6 270 top
R15  0  [R0402]  48.4 32.6 270 top
R16  100  [R0402]  13 30.59 270 top
R17  10K  [R0402]  15.5 29.6 90 top
R18  10K  [R0402]  50 28.6 0 top
R19  33K  [R0603]  59.7 27.3 180 top
R20  10  [R0603]  63.3 27.3 180 top
R21  1Meg  [R0402]  48.35 26.3 270 top
R22  6.28K  [R0603]  55.29 25.2 0 top
R23  2K  [R0402]  30 23.4 90 top
R24  2K  [R0402]  31.9 23.4 90 top
R25  6.49K  [R0603]  56.9 23.4 180 top
R26  10K  [R0402]  14 20.79 270 top
R27  10K  [R0402]  15 20.79 270 top
R28  100  [R0402]  9.6 19.5 0 top
R29  5.49K  [R0603]  55.29 18.9 0 top
R30  2K  [R0603]  58.3 18.9 0 top
R31  20K  [R0603]  61.2 18.9 0 top
R32  1.62K  [R0603]  49.2 17 180 top
R33  10  [R0603]  38.9 15.8 0 top
R34  16.2K  [R0603]  45.7 17 270 top
R35  10K  [R0402]  5.8 14.7 90 top
R36  1K  [R0402]  6.8 14.7 90 top
R37  10K  [R0402]  7.3 15.69 270 top
R38  1K  [R0402]  8.8 14.7 90 top
R39  10K  [R0402]  27.8 14.7 90 top
R40  1K  [R0402]  28.8 14.7 90 top
R41  1K  [R0402]  29.8 14.7 90 top
R42  10K  [R0402]  30.3 15.69 270 top
R43  2.94K  [R0603]  33.13 14.39 90 top
R44  20K  [R0603]  48.4 12.5 90 top
R45  2K  [R0603]  49 14.1 270 top
R46  16.2K  [R0603]  33.13 11.8 90 top
R47  200  [R0603]  64.1 12.2 180 top
R48  2K  [R0603]  62.35 8.2 270 top
R49  33K  [R0603]  41.6 3.4 90 top
R50  2.37K  [R0603]  42.9 3.4 90 top
R51  6.28K  [R0603]  45.5 3.4 90 top
R52  10K  [R0402]  39.2 40.1 0 bottom
R53  10K  [R0402]  34.1 40.1 0 bottom
R54  10K  [R0402]  28.6 39.6 180 bottom
R55  10K  [R0402]  23.9 39.6 180 bottom
R56  10K  [R0402]  19.2 39.6 180 bottom
R57  DNP  [R0402]  44.9 39.3 180 bottom
R58  120  [R0402]  46.6 39.4 270 bottom
R59  2.5K  [R0402]  14.3 39.19 270 bottom
R60  DNP  [R0402]  12.8 38.2 90 bottom
R61  200  [R0402]  11.7 39.19 270 bottom
R62  DNP  [R0402]  5.8 38.2 90 bottom
R63  200  [R0402]  4.1 38.2 90 bottom
R64  2.5K  [R0402]  3.6 39.19 270 bottom
R65  10K  [R0402]  63 38.9 270 bottom
R66  10K  [R0402]  59.8 37.91 90 bottom
R67  DNP  [R0402]  44.9 38 180 bottom
R68  DNP  [R0402]  43.9 37.2 0 bottom
R69  DNP  [R0402]  7.1 36.4 180 bottom
R70  120  [R0402]  46.6 36.8 270 bottom
R71  DNP  [R0402]  43.9 36 0 bottom
R72  1K  [R0402]  7.1 35.3 180 bottom
R73  DNP  [R0402]  10.5 35.6 0 bottom
R74  10K  [R0402]  24 34.05 180 bottom
R75  1K  [R0402]  10.5 34.5 0 bottom
R76  0  [R0402]  40.1 34.3 0 bottom
R77  DNP  [R0402]  37.6 34.3 0 bottom
R78  1.25K  [R0402]  14.3 34.39 270 bottom
R79  1.25K  [R0402]  3.6 34.39 270 bottom
R80  47K  [R0402]  51 32.3 180 bottom
R81  147K  [R0402]  51 31.23 180 bottom
R82  16.2K  [R0402]  15 29.61 90 bottom
R83  8.25K  [R0402]  14.5 30.6 270 bottom
R84  10K  [R0402]  40.3 29.6 90 bottom
R85  33  [R0402]  38.9 29.6 90 bottom
R86  33  [R0402]  37.9 29.6 90 bottom
R87  33  [R0402]  36.9 29.6 90 bottom
R88  10K  [R0402]  10.2 28.7 180 bottom
R89  100  [R0402]  6.5 29.2 0 bottom
R90  10K  [R0402]  3.8 29.2 0 bottom
R91  DNP  [R0402]  9.21 28 0 bottom
R92  DNP  [R0402]  4.79 27.5 180 bottom
R93  0  [R0402]  1.8 26.6 90 bottom
R94  5K  [R0402]  10.2 26.3 180 bottom
R95  DNP  [R0402]  7.49 26.3 180 bottom
R96  5K  [R0402]  3.8 26.8 0 bottom
R97  1K  [R0402]  28.7 25.81 90 bottom
R98  10K  [R0402]  28.1 26.8 270 bottom
R99  10K  [R0402]  26.5 25.81 90 bottom
R100  5K  [R0402]  26 26.8 270 bottom
R101  5K  [R0402]  23 26.8 270 bottom
R102  DNP  [R0402]  21.2 25.81 90 bottom
R103  10K  [R0402]  20.5 26.8 270 bottom
R104  1K  [R0402]  19 25.81 90 bottom
R105  DNP  [R0402]  4.79 25 180 bottom
R106  0  [R0402]  1.8 24 90 bottom
R107  5K  [R0402]  10.2 23.7 180 bottom
R108  DNP  [R0402]  7.49 23.7 180 bottom
R109  5K  [R0402]  3.8 24.2 0 bottom
R110  DNP  [R0402]  10.2 22.4 180 bottom
R111  DNP  [R0402]  4.79 22.4 180 bottom
R112  DNP  [R0402]  1.8 21.6 90 bottom
R113  10K  [R0402]  9.21 21.7 0 bottom
R114  100  [R0402]  6.5 21.7 0 bottom
R115  10K  [R0402]  3.8 21.7 0 bottom
R116  1K  [R0402]  29.3 21.2 270 bottom
R117  10K  [R0402]  27.7 20.21 90 bottom
R118  10K  [R0402]  26.9 21.2 270 bottom
R119  5K  [R0402]  25.6 21.2 270 bottom
R120  5K  [R0402]  23.1 21.2 270 bottom
R121  10K  [R0402]  21.8 21.2 270 bottom
R122  10K  [R0402]  20.1 20.21 90 bottom
R123  1K  [R0402]  19.5 21.2 270 bottom
R124  16.2K  [R0402]  15.5 20.79 270 bottom
R125  16.2K  [R0402]  14 19.8 90 bottom
R126  DNP  [R0402]  45 19.5 90 bottom
R127  0  [R0402]  44.5 20.49 270 bottom
R128  DNP  [R0402]  28.8 15.7 270 bottom
R129  DNP  [R0402]  4.8 15.7 270 bottom
R130  DNP  [R0402]  27.3 14.7 90 bottom
R131  0  [R0402]  26.3 14.7 90 bottom
R132  0  [R0402]  6.3 14.7 90 bottom
R133  DNP  [R0402]  5.3 14.7 90 bottom
R134  1K  [R0402]  22.8 12.6 0 bottom
R135  1K  [R0402]  12.1 12.1 180 bottom
R136  0.2  [R2010]  23.34 10.1 270 bottom
R137  0.2  [R2010]  11.65 10.1 270 bottom
REF  -  [unnamed#2]  34 51 0 top
TP1  TEST POINT  [SCREW-3D5-2D5]  2.5 45.5 0 top
TP2  TEST POINT  [SCREW-3D5-2D5]  65.5 45.5 0 top
TP3  TEST POINT  [SCREW-3D5-2D5]  2.5 2.5 0 top
TP4  TEST POINT  [SCREW-3D5-2D5]  65.5 2.5 0 top
TP5  T POINT A  [TP_SMD_CIR_2D0]  35.7 3.8 180 bottom
TP6  T POINT A  [TP_SMD_CIR_2D0]  32.2 3.8 180 bottom
U1  SGM7SZ14  [SOT-23-5]  38.9 42.7 180 top
U2  UN3490E  [SO-8]  44.1 35.7 90 top
U3  SGM2028-ADJ  [SOT-23-5]  61.3 37.2 0 top
U4  SGM7SZ14  [SOT-23-5]  19.6 37.1 180 top
U5  SGM7SZ14  [SOT-23-5]  24.3 37.1 180 top
U6  SGM7SZ14  [SOT-23-5]  29 37.1 180 top
U7  SGM7SZ14  [SOT-23-5]  33.7 37.1 180 top
U8  SGM7SZ14  [SOT-23-5]  38.9 37.1 180 top
U9  SGM2028-3.3  [SOT-23-5]  53.8 37.1 0 top
U10  SGM8968-2  [SOIC-8]  8.7 34.9 270 top
U11  CJ431  [SOT-23-3]  3.2 33.7 0 top
U12  CJ431  [SOT-23-3]  14.2 33.7 0 top
U13  SGM2028-ADJ  [SOT-23-5]  51.6 31.6 90 top
U14  SGM7SZ14  [SOT-23-5]  19.6 31.5 180 top
U15  SGM7SZ14  [SOT-23-5]  24.3 31.5 180 top
U16  SGM7SZ14  [SOT-23-5]  29 31.5 180 top
U17  GD32F303RGT6  [LQFP64]  39.9 26.5 90 top
U18  SGM8968-4XS14G/TR  [SOIC-14]  4.3 21.4 90 top
U19  SGM58031XMS10G/TR  [MSOP-10]  15 22.7 180 top
U20  SGM8968-4XS14G/TR  [SOIC-14]  20.3 26.1 0 top
U21  SGM6230  [SOIC-8-EPAD]  59.1 21.1 90 top
U22  AS4950  [SOP8-PP]  8.3 7.8 180 top
U23  AS4950  [SOP8-PP]  30.5 7.8 180 top
U24  SGM6230  [SOIC-8-EPAD]  45.7 7.5 180 top
U25  SM712  [SOT-23-3]  48.6 44.8 180 bottom
U26  SM712  [SOT-23-3]  45 44.8 180 bottom
U27  SGM2028-3.3  [SOT-23-5]  38.9 42.7 0 bottom
U28  SGM7SZ08YXDM6G/TR  [XTDFN-1X1-6L]  54.5 37.9 0 bottom
U29  SGM7SZ08YXDM6G/TR  [XTDFN-1X1-6L]  50 38 180 bottom
U30  SGM7SZ08YXDM6G/TR  [XTDFN-1X1-6L]  47.4 37.3 0 bottom
U31  SGM7SZ14  [SOT-23-5]  38.9 37.1 0 bottom
U32  SGM7SZ14  [SOT-23-5]  33.7 37.1 0 bottom
U33  SGM7SZ14  [SOT-23-5]  29 37.1 0 bottom
U34  SGM7SZ14  [SOT-23-5]  24.3 37.1 0 bottom
U35  SGM7SZ14  [SOT-23-5]  19.6 37.1 0 bottom
U36  SGM7SZ08YXDM6G/TR  [XTDFN-1X1-6L]  54.6 36.5 180 bottom
U37  SGM7SZ08YXDM6G/TR  [XTDFN-1X1-6L]  29.7 32.3 0 bottom
U38  SGM7SZ08YXDM6G/TR  [XTDFN-1X1-6L]  20.3 32.3 0 bottom
U39  SGM7SZ14  [SOT-23-5]  24.3 31.5 0 bottom
U40  SGM7SZ08YXDM6G/TR  [XTDFN-1X1-6L]  29.3 30.9 180 bottom
U41  SGM7SZ08YXDM6G/TR  [XTDFN-1X1-6L]  20 30.9 180 bottom
U42  GD25Q40ETIG  [SOP8-150MIL]  41.7 28 180 bottom
UNK*  -  [unnamed#2]  24 51 0 top
UNK*#2  -  [unnamed#2]  71 14 0 top
UNK*#3  -  [unnamed#2]  -3 24 0 top
UNK*#4  -  [unnamed#2]  44 51 0 top
UNK*#5  -  [unnamed#2]  34 -3 0 top
UNK*#6  -  [unnamed#2]  44 -3 0 top
UNK*#7  -  [unnamed#2]  -3 34 0 top
UNK*#8  -  [unnamed#2]  24 -3 0 top
UNK*#9  -  [unnamed#2]  71 24 0 top
UNK*#10  -  [unnamed#2]  71 34 0 top
UNK*#11  -  [unnamed#2]  -3 14 0 top
UNK*#12  -  [unnamed#2]  34 -3 180 bottom
UNK*#13  -  [unnamed#2]  44 51 180 bottom
UNK*#14  -  [unnamed#2]  24 51 180 bottom
UNK*#15  -  [unnamed#2]  -3 24 180 bottom
UNK*#16  -  [unnamed#2]  71 24 180 bottom
UNK*#17  -  [unnamed#2]  -3 14 180 bottom
UNK*#18  -  [unnamed#2]  -3 34 180 bottom
UNK*#19  -  [unnamed#2]  34 51 180 bottom
UNK*#20  -  [unnamed#2]  24 -3 180 bottom
UNK*#21  -  [unnamed#2]  44 -3 180 bottom
UNK*#22  -  [unnamed#2]  71 34 180 bottom
UNK*#23  -  [unnamed#2]  71 14 180 bottom
Y1  8MHz  [CRY-SMD-3D2X2D5MM-4P]  50.8 24.7 90 top
Y2  32.768KHz  [CRY-SMD-3D2X1D5MM-2P]  51.3 22.1 270 top

## Library data of the parts
BT1 = BATTERY
C1-C106 = CAP NP
D1-D9 D15-D30 D32-D34 D36 = DIODE TS BI-DIR
D10 D11 D13 = LED
D12 D14 D31 D35 = DIODE ZENER_0
J1 J4 J7 J9 = Header1x6_0
J2 = Header1x16_0
J3 J5 J6 J8 = Header1x4_0
L1-L3 L5 = INDUCTOR
L4 = BEAD
Q1-Q3 = 2N2800
Q4 = NCE55P05S_1
Q5 = BAT54CW_0
R1-R137 = R
TP1-TP4 = TEST POINT
TP5 TP6 = T POINT A
U1 U4-U8 U14-U16 U31-U35 U39 = SGM7SZ14
U2 = UN3490E
U3 U9 U13 U27 = SGM2028
U10 = SGM8968-2
U11 U12 = CJ431_0
U17 = GD32F303RE
U18 U20 = SGM8968-4
U19 = SGM58031
U21 U24 = SGM6230
U22 U23 = AS4950
U25 U26 = SM712
U28-U30 U36-U38 U40 U41 = SGM7SZ08YXDM6G/TR
U42 = GD25Q40E
Y1 = CRYSTAL_1
Y2 = CRYSTAL

## Footprints (pads in the part's own frame, mm; a bottom-side part is the same pattern mirrored in y, then rotated)
C0402
  rect 0.6x0.5 smd: 1(0.01,0.25) 2(0.97,0.25)
C0603
  rect 0.4x0.8 smd: 1(0.1,0.4) 2(1.5,0.4)
C0805
  rect 0.7x1 smd: 1(0.2,0.62) 2(1.8,0.62)
C1210
  rect 1.2x2.5 smd: 1(0,0) 2(2.8,0)
C2220
  rect 1x5 smd: 1(0,0) 2(5.2,0)
CRY-SMD-3D2X1D5MM-2P
  rect 1.1x1.9 smd: 1(0,0) 2(2.5,0)
CRY-SMD-3D2X2D5MM-4P
  rect 1.3x1.1 smd: 1(0,-1.8) 2(2.3,-1.8) 3(2.3,0) 4(0,0)
DFN-1006DN
  rect 0.2x0.5 smd: 1(0,0) 2(0.65,0)
DO-214AC
  rect 1.8x2.1 smd: 1(0.13,1.4) 2(4.53,1.4)
FB0402
  rect 0.5x0.5 smd: 1(0.05,0.24) 2(0.95,0.24)
IND-5D7X5D2X1D8
  rect 2x3 smd: 1(0,0) 2(4.2,0)
L1206
  rect 0.8x1.8 smd: 1(0,0) 2(2.5,0)
LED0402
  rect 0.4x0.6 smd: 1(-0.1,0.25) 2(1.1,0.25)
LQFP64
  rect 0.2x0.75 smd: 1(-3.75,-5.6) 2(-3.25,-5.6) 3(-2.75,-5.6) 4(-2.25,-5.6) 5(-1.75,-5.6) 6(-1.25,-5.6) 7(-0.75,-5.6) 8(-0.25,-5.6) 9(0.25,-5.6) 10(0.75,-5.6) 11(1.25,-5.6) 12(1.75,-5.6) 13(2.25,-5.6) 14(2.75,-5.6) 15(3.25,-5.6) 16(3.75,-5.6) 33(3.75,5.6) 34(3.25,5.6) 35(2.75,5.6) 36(2.25,5.6) 37(1.75,5.6) 38(1.25,5.6) 39(0.75,5.6) 40(0.25,5.6) 41(-0.25,5.6) 42(-0.75,5.6) 43(-1.25,5.6) 44(-1.75,5.6) 45(-2.25,5.6) 46(-2.75,5.6) 47(-3.25,5.6) 48(-3.75,5.6)
  rect 0.75x0.2 smd: 17(5.6,-3.75) 18(5.6,-3.25) 19(5.6,-2.75) 20(5.6,-2.25) 21(5.6,-1.75) 22(5.6,-1.25) 23(5.6,-0.75) 24(5.6,-0.25) 25(5.6,0.25) 26(5.6,0.75) 27(5.6,1.25) 28(5.6,1.75) 29(5.6,2.25) 30(5.6,2.75) 31(5.6,3.25) 32(5.6,3.75) 49(-5.6,3.75) 50(-5.6,3.25) 51(-5.6,2.75) 52(-5.6,2.25) 53(-5.6,1.75) 54(-5.6,1.25) 55(-5.6,0.75) 56(-5.6,0.25) 57(-5.6,-0.25) 58(-5.6,-0.75) 59(-5.6,-1.25) 60(-5.6,-1.75) 61(-5.6,-2.25) 62(-5.6,-2.75) 63(-5.6,-3.25) 64(-5.6,-3.75)
MSOP-10
  rect 0.3x1 smd: 1(0,-5) 2(0.5,-5) 3(1,-5) 4(1.5,-5) 5(2,-5) 6(2,0) 7(1.5,0) 8(1,0) 9(0.5,0) 10(0,0)
R0402
  rect 0.6x0.5 smd: 1(0.01,0.25) 2(0.97,0.25)
R0603
  rect 0.4x0.8 smd: 1(0.1,0.4) 2(1.5,0.4)
R2010
  rect 1.7x3.15 smd: 1(0,0) 2(6,0)
SCREW-3D5-2D5
  round 3.5 hole 2.5: 1(0,0)
SMD-PH2D0-4P-HOR
  rect 1x3.5 smd: 1(-3,1.9) 2(-1,1.9) 3(1,1.9) 4(3,1.9)
  rect 1.5x3.5 smd: 5(5.5,-3.8) 6(-5.5,-3.8)
SMD-SH1D0-4P-HOR
  rect 0.5x1.2 smd: 1(-1.5,0.74) 2(-0.5,0.74) 3(0.5,0.74) 4(1.5,0.74)
  rect 0.8x1.8 smd: 5(2.8,-3.3) 6(-2.8,-3.3)
SMD-SH1D0-6P-HOR
  rect 0.5x1.2 smd: 1(-2.5,0.7) 2(-1.5,0.7) 3(-0.5,0.7) 4(0.5,0.7) 5(1.5,0.7) 6(2.5,0.7)
  rect 0.8x1.8 smd: 7(3.8,-3.3) 8(-3.8,-3.3)
SMD-SH1D0-16P-HOR
  rect 0.5x1.2 smd: 1(-7.5,0.7) 2(-6.5,0.7) 3(-5.5,0.7) 4(-4.5,0.7) 5(-3.5,0.7) 6(-2.5,0.7) 7(-1.5,0.7) 8(-0.5,0.7) 9(0.5,0.7) 10(1.5,0.7) 11(2.5,0.7) 12(3.5,0.7) 13(4.5,0.7) 14(5.5,0.7) 15(6.5,0.7) 16(7.5,0.7)
  rect 0.8x1.8 smd: 17(8.8,-3.3) 18(-8.8,-3.3)
SO-8
  rect 0.65x1.35 smd: 1(0,-5.4) 2(1.27,-5.4) 3(2.54,-5.4) 4(3.81,-5.4) 5(3.81,0) 6(2.54,0) 7(1.27,0) 8(0,0)
SOD-123
  rect 0.6x0.5 smd: 1(0,0) 2(3.1,0)
SOIC-8
  rect 0.5x1 smd: 1(-1.89,-2.56) 2(-0.62,-2.56) 3(0.65,-2.56) 4(1.92,-2.56) 5(1.92,2.54) 6(0.65,2.54) 7(-0.62,2.54) 8(-1.89,2.54)
SOIC-8-EPAD
  rect 0.61x1.91 smd: 1(0,-5.6) 2(1.27,-5.6) 3(2.54,-5.6) 4(3.81,-5.6) 5(3.81,0) 6(2.54,0) 7(1.27,0) 8(0,0)
  rect 3x2 smd: 9(1.85,-2.8)
SOIC-14
  rect 0.6x2.2 smd: 1(0,-5.4) 2(1.27,-5.4) 3(2.54,-5.4) 4(3.81,-5.4) 5(5.08,-5.4) 6(6.35,-5.4) 7(7.62,-5.4) 8(7.62,0) 9(6.35,0) 10(5.08,0) 11(3.81,0) 12(2.54,0) 13(1.27,0) 14(0,0)
SOP8-150MIL
  rect 0.5x0.9 smd: 1(0,-5.1) 2(1.27,-5.1) 3(2.54,-5.1) 4(3.81,-5.1) 5(3.81,0) 6(2.54,0) 7(1.27,0) 8(0,0)
SOP8-PP
  rect 0.45x1.2 smd: 1(0,-5) 2(1.27,-5) 3(2.54,-5) 4(3.81,-5) 5(3.81,0) 6(2.54,0) 7(1.27,0) 8(0,0)
  rect 3x2 smd: 9(1.9,-2.5)
SOP-8
  rect 0.45x1.2 smd: 1(0,-5) 2(1.27,-5) 3(2.54,-5) 4(3.81,-5) 5(3.81,0) 6(2.54,0) 7(1.27,0) 8(0,0)
SOT-23-3
  rect 0.8x0.8 smd: 1(-0.95,-1.4) 2(0.95,-1.4) 3(0,1.4)
SOT-23-5
  rect 0.5x0.8 smd: 1(-0.95,-1.45) 2(0,-1.45) 3(0.95,-1.45) 4(0.96,1.45) 5(-0.94,1.45)
SOT-323
  rect 0.8x0.8 smd: 1(-0.95,-1.4) 2(0.95,-1.4) 3(0,1.4)
TP_SMD_CIR_2D0
  round 2 smd: 1(0,0)
unnamed#2
  round 1.5 smd: (0,0)
XTDFN-1X1-6L
  rect 0.2x0.53 smd: 1(0,-0.75) 2(0.35,-0.75) 3(0.7,-0.75) 4(0.7,0) 5(0.35,0) 6(0,0)

## Nets
GND: BT1.2(-) C1.1 C2.2 C3.1 C4.2 C5.1 C6.1 C7.1 C8.1 C9.1 C10.1 C11.1 C12.1 C13.1 C14.1 C15.1 C16.1 C17.2 C18.2 C19.2 C20.2 C21.2 C22.1 C23.1 C24.1 C25.1 C26.2 C27.2 C28.2 C29.1 C30.1 C31.1 C32.2 C35.2 C36.2 C37.1 C38.1 C39.1 C40.2 C41.2 C42.2 C44.1 C45.1 C46.2 C47.2 C48.1 C50.2 C51.1 C52.1 C53.1 C54.1 C55.1 C56.1 C57.1 C58.1 C59.1 C60.1 C61.1 C62.1 C63.1 C64.2 C65.2 C66.2 C67.2 C68.2 C69.2 C70.1 C71.1 C72.1 C73.1 C74.1 C75.2 C76.2 C77.1 C78.1 C79.2 C80.1 C81.1 C82.1 C83.1 C84.1 C85.1 C86.1 C87.1 C88.1 C89.1 C90.1 C91.1 C92.2 C93.1 C94.1 C95.2 C96.1 C97.1 C98.2 C99.1 C100.1 C101.1 C102.2 C103.2 C104.1 C105.1 C106.1 D1.1 D2.1 D3.1 D4.1 D5.1 D6.1 D7.1 D8.1 D9.1 D14.2 D15.1 D16.1 D17.1 D18.1 D19.1 D20.1 D21.1 D22.1 D23.2 D24.2 D25.1 D26.1 D27.1 D28.1 D29.1 D30.1 D31.2 D32.1 D33.1 D34.1 D35.2 D36.1 J1.2 J1.4 J1.7 J1.8 J2.16 J2.17 J2.18 J3.5 J3.6 J4.3 J4.4 J4.7 J4.8 J5.5 J5.6 J6.1 J6.2 J6.5 J6.6 J7.5 J7.7 J7.8 J8.2 J8.5 J8.6 J9.3 J9.4 J9.7 J9.8 R10.1 R22.1 R25.1 R29.1 R30.1 R32.1 R35.2 R37.1 R39.2 R42.1 R43.2 R45.1 R50.1 R51.2 R67.2 R68.1 R77.1 R80.1 R83.1 R91.1 R92.1 R95.2 R99.2 R102.2 R105.1 R108.2 R110.1 R111.1 R112.1 R118.2 R121.2 R125.1 R127.1 R128.1 R129.1 R136.1 R137.1 TP1.1 TP2.1 TP3.1 TP4.1 TP6.1(TP) U1.3 U2.4 U3.2 U4.3 U5.3 U6.3 U7.3 U8.3 U9.2 U10.4 U11.3 U12.3 U13.2 U14.3 U15.3 U16.3 U17.12 U17.18(VSS_4) U17.31 U17.47 U17.63 U18.11 U19.1 U19.3 U20.11 U21.4 U21.9 U22.1 U22.9 U23.1 U23.9 U24.4 U24.9 U25.3 U26.3 U27.2 U28.3 U29.3 U30.3 U31.3 U32.3 U33.3 U34.3 U35.3 U36.3 U37.3 U38.3 U39.3 U40.3 U41.3 U42.4 Y1.2 Y1.4
VBAT: D12.1(CATHODE) J6.3 J6.4 Q3.1(EMITTER) Q4.1 Q4.2 Q4.3(S.3) R48.2
VDD5: C5.2 C55.2 C56.2 C70.2 C73.2 C83.2 C90.2 C95.1 R59.1 R64.1 R78.1 R79.1 R81.1 R82.2 U10.8 U13.5(OUT) U18.4 U20.4
VDD5_DISP: C7.2 J4.1 J4.2 R9.1 U3.5(OUT)
VDD12: C106.2 L2.2 L3.1 L5.1 R49.1
VDD12_LDM: L5.2 TP5.1(TP)
VDD12_MOTOR: C46.1 C47.1 C48.2 C99.2 C102.1 C103.1 L3.2 R46.1 U22.5 U23.5
VDD33: C2.1 C3.2 C4.1 C17.1 C18.1 C19.1 C20.1 C21.1 C26.1 C27.1 C28.1 C39.2 C57.2 C63.2 C64.1 C65.1 C66.1 C67.1 C68.1 C69.1 C75.1 C76.1 C78.2 C79.1 C80.2 C92.1 C98.1 J7.6 J9.5 J9.6 L4.1 Q5.1 R1.2 R2.2 R3.2 R4.2 R5.2 R6.2 R11.2 R12.2 R13.2 R17.2 R18.2 R23.2 R24.2 R26.2 R27.2 R52.2 R53.2 R54.2 R55.2 R56.2 R57.2 R65.2 R66.2 R71.1 R74.2 R76.2 R84.2 R124.2 R126.2 R130.2 R133.2 U1.5 U2.1 U4.5 U5.5 U6.5 U7.5 U8.5 U9.5(OUT) U14.5 U15.5 U16.5 U17.19 U17.32 U17.48 U17.64 U19.8(VDD) U28.1 U28.6 U29.1 U29.6 U30.1 U30.6 U31.5 U32.5 U33.5 U34.5 U35.5 U36.1 U36.6 U37.1 U37.6 U38.1 U38.6 U39.5 U40.1 U40.6 U41.1 U41.6 U42.3(WP#(IO2)) U42.7 U42.8
VDD33_WIFI: C53.2 J8.1 U27.5(OUT)
VDD33A: C81.2 C84.2 L4.2 U17.13
VDD55: C13.2 C14.2 C15.2 C16.2 C25.2 C30.2 C51.2 C52.2 C77.2 L1.2 R19.1 U3.1 U3.3 U9.1 U9.3 U13.1 U13.3 U27.1 U27.3
ADC012_IN10: C89.2 R104.1 U17.11
ADC012_IN11: C86.2 R97.1 U17.10
ADC012_IN12: C96.2 R123.1 U17.9
ADC012_IN13: C94.2 R116.1 U17.8
ADC_RDY: R17.1 U17.45 U19.2
ADC_VR1: R7.2 R93.2
ADC_VR2: R8.2 R106.2
BOOT0: R126.1 R127.2 U17.60
BOOT1: R76.1 R77.2 U17.28
CON_FLASH: U17.56 U31.4(Y)
DAC_OUT0: R132.2 U17.21
DAC_OUT1: R131.2 U17.20
DAY_NIGHT: U1.4(Y) U17.15
DOWN_SW: U5.4(Y) U17.25
FL_ADD: U15.4(Y) U17.41
FL_SUB: U14.4(Y) U17.44
I2C0_SCL: R27.1 U17.61 U19.10
I2C0_SDA: R26.1 U17.62 U19.9
IO_CON_FLASH: C58.2 D16.2 J2.3 R52.1 U31.2
IO_DAY_NIGHT: C1.2 D1.2 J2.2 R1.1 U1.2
IO_DOWN: C9.2 D3.2 J2.12 R3.1 U5.2
IO_FL_ADD: C23.2 D8.2 J2.10 R12.1 U15.2
IO_FL_SUB: C22.2 D7.2 J2.11 R11.1 U14.2
IO_LASER_MODE1: C59.2 D17.2 J2.8 R53.1 U32.2
IO_LASER_MODE2: C11.2 D5.2 J2.9 R5.1 U7.2
IO_LASER_MODE3: C60.2 D18.2 J2.6 R54.1 U33.2
IO_LASER_MODE4: C10.2 D4.2 J2.7 R4.1 U6.2
IO_LEFT: C62.2 D20.2 J2.14 R56.1 U35.2
IO_M1_OUT1: J5.2 U22.6
IO_M1_OUT2: J5.1 U22.8
IO_M2_OUT1: J5.4 U23.6
IO_M2_OUT2: J5.3 U23.8
IO_RIGHT: C8.2 D2.2 J2.15 R2.1 U4.2
IO_RS422_RX+: J3.1 R70.2 R71.2 U2.8 U25.1
IO_RS422_RX-: J3.2 R68.2 R70.1 U2.7 U25.2
IO_RS422_TX+: J3.4 R57.1 R58.1 U2.5 U26.2
IO_RS422_TX-: J3.3 R58.2 R67.1 U2.6(Z) U26.1
IO_SET: C12.2 D6.2 J2.1 R6.1 U8.2
IO_SHOT_SW1: C74.2 D27.2 J2.4 R74.1 U39.2
IO_SHOT_SW2: C24.2 D9.2 J2.5 R13.1 U16.2
IO_UART3_RX: D26.2 J8.4 U37.2
IO_UART3_TX: D29.2 J8.3 U40.4(Y)
IO_UART4_RX: D28.2 J9.2 U38.2
IO_UART4_TX: D30.2 J9.1 U41.4(Y)
IO_UP: C61.2 D19.2 J2.13 R55.1 U34.2
IO_USART0_RX: D22.2 J7.2 U30.2
IO_USART0_TX: D21.2 J7.1 U29.4(Y)
IO_USART2_RX: D15.2 J4.5 U28.2
IO_USART2_TX: D25.2 J4.6 U36.4(Y)
IO_VR1: J1.6 Q1.3 R62.2
IO_VR1_MID: J1.5 R7.1
IO_VR2: J1.1 Q2.3 R60.2
IO_VR2_MID: J1.3 R8.1
LASER_MODE1: U17.22 U32.4(Y)
LASER_MODE2: U7.4(Y) U17.2
LASER_MODE3: U17.23 U33.4(Y)
LASER_MODE4: U6.4(Y) U17.14
LED1: D10.1(CATHODE) U17.55
LED2: D11.1(CATHODE) U17.50
LEFT_SW: U17.26 U35.4(Y)
M1_PWM1: R35.1 R36.1 U22.3
M1_PWM2: R37.2 R38.1 U22.2
M2_PWM1: R39.1 R40.1 U23.3
M2_PWM2: R41.1 R42.2 U23.2
NRST: C31.2 R18.1 U17.7
OSC32IN: C40.1 U17.3 Y2.2
OSC32OUT: C36.1 U17.4 Y2.1
OSC_IN: C35.1 R21.2 U17.5 Y1.1
OSC_OUT: C32.1 R21.1 U17.6 Y1.3
RIGHT_SW: U4.4(Y) U17.27
SET_SW: U8.4(Y) U17.57
SHOT_SW1: U17.40 U39.4(Y)
SHOT_SW2: U16.4(Y) U17.39
SPI1_MISO: R86.2 U17.35
SPI1_MOSI: R87.2 U17.36
SPI1_NSS: R84.1 U17.33 U42.1
SPI1_SCK: R85.2 U17.34
SWCLK: D23.1 J7.4 R66.1 U17.49
SWDIO: D24.1 J7.3 R65.1 U17.46
TIMER3_CH0: R40.2 U17.58
TIMER3_CH1: R41.2 U17.59
TIMER7_CH0: R38.2 U17.37
TIMER7_CH1: R36.2 U17.38
UART3_RX: U17.52 U37.4(Y)
UART3_TX: U17.51 U40.2
UART4_RX: U17.54 U38.4(Y)
UART4_TX: U17.53 U41.2
UP_SW: U17.24 U34.4(Y)
USART0_RX: U17.43 U30.4(Y)
USART0_TX: U17.42 U29.2
USART1_RX: R14.2 U17.17
USART1_TX: R15.2 U17.16
USART2_RX: U17.30 U28.4(Y)
USART2_TX: U17.29 U36.2
VISEN-1: R135.2 R137.2 U22.7
VISEN-2: R134.2 R136.2 U23.7
VSYS: C41.1 C42.1 C100.2 C101.2 Q4.5 Q4.6 Q4.7 Q4.8 R31.2 R34.2 R44.2 U21.2 U24.2
N00539: R28.1 R113.2 U18.1
N00551: R110.2 R113.1 U18.2
N00622: R107.2 U18.3
N00721: R88.1 R91.2 U18.6
N00759: R16.1 R88.2 U18.7
N00847: R94.2 U18.5
N00921: R89.1 R90.2 U18.8
N00944: R90.1 R92.2 U18.9
N01017: R96.2 U18.10
N01109: R111.2 R115.1 U18.13
N01128: R114.1 R115.2 U18.14(OUTD)
N01207: R109.2 U18.12
N01411: C38.2 R28.2 U19.6
N01460: C29.2 R16.2 U19.4
N01493: C85.2 R89.2 R95.1 U19.5
N01526: C91.2 R108.1 R114.2 U19.7
N01776: C97.2 D33.2 R107.1 R124.1 R125.2
N03561: Q3.2 R47.1
N03591: D12.2 Q3.3 Q4.4 R29.2
N06057: D13.1(CATHODE) D14.1(CATHODE) R47.2
N06093: D13.2 R48.1
N06851: C37.2 U21.8
N07166: C34.2 U21.6
N07246: C34.1 R25.2
N07633: R20.2 U21.1
N07673: C33.2 R20.1
N07683: C33.1 D31.1(CATHODE) L1.1 U21.3(SW)
N07804: R19.2 R22.2 U21.5
N09307: R30.2 R31.1 U21.7
N12869: C6.2 U9.4
N14431: R80.2 R81.2 U13.4
N17341: D10.2 R23.1
N17345: D11.2 R24.1
N18762: C105.2 R120.2 R135.1
N19455: C44.2 R129.2 R132.1 R133.1 U22.4(VREF)
N20561: R120.1 U20.3
N20617: R122.1 R123.2 U20.1
N20677: R121.1 R122.2 U20.2
N22109: C45.2 R128.2 R130.1 R131.1 U23.4(VREF)
N22131: C104.2 R119.2 R134.1
N22913: R119.1 U20.5
N22945: R117.2 R118.1 U20.6
N23125: R116.2 R117.1 U20.7
N24146: R98.2 R99.1 U20.9
N24163: R97.2 R98.1 U20.8
N24605: R100.1 U20.10
N25623: C87.2 D34.2 R32.2 R34.1 R100.2
N31147: R85.1 U42.6
N31177: R87.1 U42.5
N31207: R86.1 U42.2
N33225: R93.1 R96.1 R105.2
N33519: R106.1 R109.1 R112.2
N39002: R14.1 U2.2
N39012: R15.1 U2.3
N55400: R72.2 U10.2
N55475: R62.1 R63.2 R69.2 U10.1
N55882: C72.2 U10.3 U11.1(REF)
N57140: R79.2 U11.2
N57821: Q1.1(EMITTER) R64.2 R69.1 R72.1
N58361: R78.2 U12.2
N58395: C71.2 U10.5 U12.1(REF)
N59140: Q2.1(EMITTER) R59.2 R73.1 R75.1
N59210: R60.1 R61.2 R73.2 U10.7(OUTB)
N59412: R75.2 U10.6
N554432: Q1.2 R63.1
N591840: Q2.2 R61.1
N9259533: C54.2 U27.4
N9286753: R33.2 U24.1
N9286760: C43.2 R33.1
N9286764: C43.1 D35.1(CATHODE) L2.1 U24.3(SW)
N9286887: R49.2 R50.2 U24.5
N9288776: C49.1 U24.6
N9288809: C49.2 R51.1
N9289767: C50.1 U24.8
N9291868: R44.1 R45.2 U24.7
N9293118: C82.2 D32.2 R82.1 R83.2 R94.1
N9307028: C88.2 D36.2 R43.1 R46.2 R101.2
N9307589: R102.1 R103.2 U20.13
N9307633: R103.1 R104.2 U20.14(OUTD)
N9307956: R101.1 U20.12
N9315409: C93.2 Q5.3 U17.1
N9316428: BT1.1 Q5.2
N9336743: R9.2 R10.2 U3.4

Pads without a net: U1 1; U4 1; U5 1; U6 1; U7 1; U8 1; U14 1; U15 1; U16 1; U28 5; U29 5; U30 5; U31 1; U32 1; U33 1; U34 1; U35 1; U36 5; U37 5; U38 5; U39 1; U40 5; U41 5

## Via types
v1: diameter 0.4, hole 0.2, TOP to BOTTOM, 523 vias
v2: diameter 0.3, hole 0.15, TOP to BOTTOM, 95 vias
v3: diameter 0.8, hole 0.5, TOP to BOTTOM, 28 vias

## Routing (per net, layer and track width the routed paths; a pad name or vN(x,y) marks a point on that pad's centre or on a via; arc(x,y) is an arc through that point)
GND: length 262
  TOP w0.16: v1(35.3,23) 35.05,23.25 U17.47
  TOP w0.2: D4.1 30.85,39.9 v1(31.35,39.4) 31.85,39.9 D5.1 ; C26.2 22.45,30.87 23.35,31.77 v1(23.35,32.2) U15.3 ; D7.1 21.5,34.25 v1(21.95,33.8) C22.1 ; 42.5,45.09 42.5,45.92 ; 42.5,45.09 v1(42.5,46.4) ; 42.5,45.09 42.3,44.89 41.44,44.89 41.25,44.7 C1.1 ; D2.1 21.45,39.9 v1(21.95,39.4) ; D6.1 37.1,39.9 36.6,39.4 v1(36.05,39.4) ; C20.2 36.57,36.47 37,36.9 37,37.4 37.2,37.6 v1(37.95,37.6) ; U17.63 43.15,20.25 v1(43.4,20) ; C29.1 v1(14.25,31.3) ; C17.2 22.43,36.47 22.7,36.74 22.7,37.4 22.9,37.6 v1(23.35,37.6) ; v1(54.6,33.6) 54.1,33.6 53.55,34.15 53.55,34.77 53.8,35.02 U9.2 ; C21.2 41.96,36.47 42.16,36.67 42.16,38.43 41.85,38.74 41.25,38.74 ; U16.3 v1(28.05,32.15) 28.05,31.35 27.57,30.87 C27.2 ; U17.18 43.15,33.25 v1(42.8,33.6) ; v1(41.99,42.09) 41.97,42.07 C2.2 ; D9.1 30.9,34.25 v1(31.35,33.8) C24.1 ; C23.1 v1(26.65,33.8) 26.2,34.25 D8.1 ; v1(32.75,37.6) 32.32,37.6 32.1,37.38 32.1,36.74 31.83,36.47 C19.2 ; v1(46.28,28.25) U17.12 ; v1(26.65,39.4) 26.15,39.9 D3.1 ; v1(28.05,37.6) 27.6,37.6 27.4,37.4 27.4,36.74 27.13,36.47 C18.2 ; U17.31 36.65,32.85 v1(36.5,33) ; U14.3 v1(18.65,32.15)
  TOP w0.26: C31.1 46.88,28.85 v1(46.28,28.25)
  TOP w0.3: R10.1 v1(65.1,39.6) ; U12.3 13.53,35.1 13.43,35.2 v1(13.05,35.2) ; R50.1 v1(42.5,2.9) ; C50.2 v1(46.4,2.9) ; v1(56.65,39.9) 56.6,39.95 C4.2 ; R37.1 v1(7.55,16.5) ; v1(50.95,39.95) C3.1 ; R45.1 v1(50.2,14) ; v1(45.1,5.43) R51.2 ; R42.1 v1(30.55,16.6) ; R35.2 5.04,15.67 5.03,15.68 C44.1 v1(4.55,16.5) ; v1(48.6,39.5) 48.61,39.51 U2.4 ; U1.3 v1(37.95,43.2) ; U19.1 v1(15,26.87) ; R39.2 27.04,15.67 27.03,15.68 C45.1 v1(26.55,16.6) ; U18.11 v1(5.73,25.21) ; U20.11 24.11,27.34 v1(23.75,27.7) ; R43.2 v1(32.73,16.57) ; C28.2 v1(32.08,30.87) ; U19.3 v1(14,26.87)
  TOP w0.38: C15.1 64.3,36.59 64.52,36.81 C16.1 v1(65.94,36.81) ; R25.1 v1(57.5,23) ; Y1.4 50.5,24.7 50,25.2 v1(49.7,25.2) ; U6.3 v1(28.05,37.6) ; J4.4 v1(55.8,44.4) ; C6.1 57.1,37.92 57.32,37.7 C7.1 58.4,37.7 v1(58.7,37.4) ; U4.3 v1(18.65,37.6) ; v1(4.3,35.3) 3.8,35.3 3.6,35.1 U11.3 ; U10.4 v1(6.88,32.98) ; C9.1 v1(26.65,39.4) ; v1(13.2,19.1) 13.2,19.4 13.25,19.45 C39.1 ; v1(41.25,39.4) C12.1 ; v1(52.6,28.26) Y1.2 ; U13.2 v1(52.3,31.6) ; J4.3 v1(56.8,44.4) ; C10.1 v1(31.35,39.4) ; C8.1 v1(21.95,39.4) ; C25.1 v1(54.6,33.6) ; C11.1 v1(36.05,39.4) ; C5.1 v1(7.1,39.49) ; C30.1 v1(54.6,28.9) ; v1(12.15,19.1) 12.15,19.35 12.25,19.45 C38.1 ; C36.2 v1(49.33,22.47) ; C32.2 v1(47.5,27.45) ; v1(47.5,24.15) C35.2 ; C48.1 v1(32.72,9.93) ; U5.3 v1(23.35,37.6) ; U8.3 v1(37.95,37.6) ; C40.2 v1(49.33,19.23) ; U7.3 v1(32.75,37.6) ; C13.1 57.1,36.59 57.32,36.81 C14.1 v1(58.69,36.81)
  TOP w0.4: U22.1 v1(8.3,11.87) ; J1.4 v1(10.8,42.7) ; J1.2 v1(12.8,42.7) ; U24.4 v1(41.89,11.82) ; U23.1 v1(30.5,11.87)
  TOP w0.5: U21.4 v1(63.09,24.91)
  BOTTOM w0.12: U37.3 30.9,33.05 30.92,33.07 C75.2
  BOTTOM w0.16: U29.3 48.8,37.25 48.7,37.35 48.7,37.95 48.6,38.05 U30.3 48.1,38.5 48.6,39 v1(48.6,39.5) ; C57.1 56.22,38.89 56.21,38.9 55.9,38.9 55.65,38.65 U28.3
  BOTTOM w0.2: v1(36.5,33) 36.5,33.7 36.85,34.05 R77.1 ; C74.1 26.22,33.09 26.08,32.95 U39.3 ; D16.1 36.5,39.85 v1(36.05,39.4) ; v1(18.25,27.5) C89.1 17.71,26.79 17.12,27.38 17.12,29.8 17.72,30.4 D30.1 18.73,30.4 18.98,30.15 U41.3 ; R127.1 43.72,20.48 43.4,20.16 v1(43.4,20) ; v1(22.59,29.47) 22.34,29.47 21.95,29.86 C80.1 ; D20.1 21.5,39.85 v1(21.95,39.4) C8.1 21.47,38.69 21.33,38.55 U35.3 ; D24.2 65.43,38.05 65.94,37.54 v1(65.94,36.81) ; v1(26.65,33.8) 26.15,34.3 D27.1 ; v1(37.95,37.6) 37.3,37.6 37.1,37.4 37.1,36.8 36.77,36.47 C20.2 ; D36.1 32.7,16.16 32.73,16.19 v1(32.73,16.57) ; D26.1 30.85,34.3 v1(31.35,33.8) ; v1(35.3,23) 35.3,21.1 34.73,20.53 C92.2 ; D25.1 53.18,36 53.43,35.75 U36.3 ; D25.1 51.5,36 51.05,36.45 C63.1 ; D25.1 52.7,33.6 ; D33.1 v1(13.2,19.1) ; D21.1 v1(48.6,39.5) D22.1 ; D19.1 26.2,39.85 v1(26.65,39.4) C9.1 26.22,38.69 26.08,38.55 U34.3 ; D32.1 v1(13.2,31.3) ; D28.1 21.45,34.3 v1(21.95,33.8) C76.2 21.52,33.07 21.5,33.05 U38.3 ; C18.2 27.27,36.47 27.4,36.6 27.4,37.4 27.6,37.6 v1(28.05,37.6) ; D15.1 v1(56.65,39.9) ; U40.3 28.38,30.15 28.13,30.4 D29.1 27.4,30.4 27.1,30.7 26.82,30.7 C27.2 26.25,30.87 25.97,31.15 v1(25.71,31.15) ; v1(32.75,37.6) 32.3,37.6 32.1,37.4 32.1,36.7 31.87,36.47 C19.2 ; v1(32.08,30.87) 32.08,30.14 31.85,29.91 C78.1 ; D17.1 31.8,39.85 v1(31.35,39.4) 30.9,39.85 D18.1 ; C17.2 22.57,36.47 22.7,36.6 22.7,37.4 22.9,37.6 v1(23.35,37.6) ; v1(61.2,39.3) 61.1,39.2 D23.2
  BOTTOM w0.26: v1(58.69,36.81) 58.09,36.81 57.8,36.52 57.8,35.94 57.49,35.63 C64.2
  BOTTOM w0.3: C95.2 v1(24.05,19) ; C70.1 v1(16.1,33.19) ; C55.1 v1(16.09,37.99) ; C57.1 v1(56.65,39.9) 57.33,39.9 57.8,40.37 J7.5 ; R91.1 8.75,27.75 v1(8.2,28.3) ; C75.2 v1(31.35,33.8) ; R129.1 v1(4.55,16.5) ; C87.1 v1(24.75,27.7) ; C86.1 v1(30.6,26.79) ; v1(31.35,39.4) C10.1 30.92,38.69 30.78,38.55 U33.3 ; v1(54.6,33.6) 51.4,33.6 50.99,33.19 R80.1 ; C12.1 v1(41.25,39.4) ; C12.1 40.82,38.69 40.68,38.55 U31.3 ; C12.1 42.23,38.69 42.67,38.25 R67.2 43.93,37.4 43.91,37.38 R68.1 42.64,36.95 42.16,36.47 C21.2 ; R128.1 30.02,15.69 30.55,16.22 v1(30.55,16.6) ; v1(13.2,19.1) 13.9,19.1 14.25,19.45 R125.1 ; C71.1 v1(13.05,35.2) ; R102.2 v1(21.45,27.7) ; R99.2 v1(26.75,27.7) ; C96.1 v1(18.25,19.5) ; C99.1 v1(3.08,17.08) ; C56.1 2.2,36.4 2.7,35.9 3.7,35.9 v1(4.3,35.3) ; R118.2 v1(26.65,19) ; v1(23.75,27.7) C88.1 ; C94.1 v1(30.68,20.22) ; U42.4 v1(37.89,23.68) ; R121.2 v1(21.55,19) ; C74.1 v1(26.65,33.8)
  BOTTOM w0.38: C97.1 v1(12.15,19.1) ; R110.1 v1(11.4,22.65) ; R95.2 6.52,27.16 v1(6.51,27.17) C85.1 R92.1 ; C72.1 4.35,33.38 4.73,33 v1(5.2,33) ; C52.1 v1(41.98,43.32) ; v1(37.95,43.2) 38.7,43.2 38.9,43.4 U27.2 ; v1(47.5,27.45) 47.89,27.45 48.68,28.24 C84.1 48.68,29.35 48.9,29.57 C81.1 ; C90.1 v1(11.4,25.25) ; C83.1 50.3,28.4 50.88,27.82 52.16,27.82 v1(52.6,28.26) ; v1(49.7,25.2) 49.18,25.2 48.9,24.92 BT1.2 ; C54.1 v1(41.99,42.09) ; C82.1 v1(12.15,31.3) ; R105.1 5.69,25.25 v1(5.73,25.21) ; R112.1 v1(2.05,20.9) ; R83.1 v1(14.25,31.3) ; R108.2 6.52,23.31 v1(6.51,23.3) C91.1 R111.1 ; v1(36.05,39.4) C11.1 35.62,38.69 35.48,38.55 U32.3 ; C73.1 v1(2.2,31.4)
  BOTTOM w0.4: C104.1 v1(24.5,13.45) ; C105.1 v1(10.4,13.45)
  BOTTOM w0.42: J9.3 v1(21.8,43.5) ; C51.1 v1(36,43.07) C53.1 ; J9.4 v1(22.8,43.5) ; J8.2 v1(30.9,43)
  BOTTOM w0.5: 47.16,19.52 47.36,19.72 47.36,20.41 C93.1 ; 47.16,19.52 C98.2 ; 47.16,19.52 49.04,19.52 v1(49.33,19.23)
  vias: v1(1.5,17.9) v1(1.5,16.9) v1(1.5,15.9) v1(1.5,14.9) v1(1.5,13.9) v1(1.5,12.9) v1(1.5,11.9) v1(1.5,10.9) v1(1.5,9.9) v1(1.5,8.9) v1(1.5,7.9) v1(1.5,6.9) v1(1.5,5.9) v1(2.5,17.9) v1(3.5,17.9) v1(4.5,17.9) v1(5.4,10.8) v1(5.4,9.8) v1(5.5,17.9) v1(6,46.4) v1(6,1.5) v1(6.4,11) v1(6.4,10.3) v1(6.4,9.6) v1(6.5,17.9) v1(7,1.5) v1(7.4,10.8) v1(7.4,9.8) v1(7.5,17.9) v1(8,1.5) v1(8.5,46.4) v1(8.5,17.9) v1(9,1.5) v1(9.5,46.4) v1(9.5,17.9) v1(10,1.5) v1(10.5,46.4) v1(10.5,17.9) v1(11,1.5) v1(11.5,46.4) v1(11.5,17.9) v1(12.5,46.4) v1(12.5,17.9) v1(13,1.5) v1(13.5,46.4) v1(14,1.5) v1(14.5,46.4) v1(15,1.5) v1(16,1.5) v1(16.5,46.5) v1(17,1.5) v1(18,1.5) v1(18.1,42.1) v1(18.1,41.5) v1(18.7,42.1) v1(18.7,41.5) v1(19,1.5) v1(19.5,46.4) v1(20,1.5) v1(20.5,46.4) v1(21,1.5) v1(21.5,46.4) v1(22,1.5) v1(22.5,46.4) v1(23.5,46.4) v1(24,1.5) v1(24.5,46.4) v1(25,1.5) v1(25.5,46.4) v1(26,1.5) v1(26.9,46.4) v1(27,1.5) v1(27.6,10.8) v1(27.6,9.8) v1(27.8,46.4) v1(28,1.5) v1(28.6,11) v1(28.6,10.3) v1(28.6,9.6) v1(29,1.5) v1(29.5,46.4) v1(29.6,10.8) v1(29.6,9.8) v1(30,1.5) v1(30.5,46.4) v1(31,1.5) v1(31.5,46.4) v1(32,1.5) v1(32.5,46.4) v1(33,1.5) v1(33.5,46.4) v1(34,1.5) v1(35,1.5) v1(35.1,46.4) v1(36,1.5) v1(37,1.5) v1(38,1.5) v1(39,1.5) v1(40,1.5) v1(40.5,46.4) v1(41,1.5) v1(41.5,46.4) v1(42,1.5) v1(42.7,11) v1(42.7,9.7) v1(43,10.3) v1(43,1.5) v1(43.8,9.6) v1(43.9,11) v1(43.85,10.3) v1(44,1.5) v1(44.5,17.9) v1(44.6,10.3) v1(45,11) v1(45,9.7) v1(45,1.5) v1(45.5,17.9) v1(46,1.5) v1(46.5,46.4) v1(47,1.5) v1(47.5,46.4) v1(47.5,17.9) v1(48,1.5) v1(48.5,17.9) v1(49,1.5) v1(49.5,17.9) v1(50,1.5) v1(50.5,46.4) v1(50.5,17.9) v1(50.8,10.3) v1(50.8,9.6) v1(50.8,8.9) v1(50.8,8.2) v1(50.8,7.5) v1(51,1.5) v1(51.5,46.4) v1(51.5,17.9) v1(52,1.5) v1(52.5,17.9) v1(52.9,10.3) v1(52.9,9.6) v1(52.9,8.9) v1(52.9,8.2) v1(52.9,7.5) v1(53,1.5) v1(53.5,17.9) v1(54,46.4) v1(54,1.5) v1(54.3,27.5) v1(54.3,26.5) v1(54.3,25.5) v1(54.3,24.5) v1(54.3,23.5) v1(54.3,22.5) v1(54.3,21.5) v1(54.3,20.5) v1(54.3,19.5) v1(54.5,17.9) v1(55,46.4) v1(55,1.5) v1(55.5,17.9) v1(56,46.4) v1(56,1.5) v1(56.5,17.9) v1(57,46.4) v1(57,1.5) v1(57.5,17.9) v1(58,46.4) v1(58,1.5) v1(58.4,17.9) v1(59,46.4) v1(59,1.5) v1(60,1.5) v1(61,1.5) v1(61.2,24.1) v1(61.2,23.2) v1(61.2,21.8) v1(61.6,46.4) v1(61.9,23.7) v1(61.9,22.95) v1(61.9,22.1) v1(62,1.5) v1(62.6,24.1) v1(62.6,22.7) v1(62.6,21.8) v1(64.1,6.8) v1(64.2,17.9) v1(64.6,34.2) v1(65.17,6.83) v1(65.6,34.2) v1(66.6,34.2) v2(59.2,36.2) v3(1.6,43.3) v3(1.6,4.7) v3(2.9,43.2) v3(2.9,4.9) v3(4.1,43.8) v3(4.2,4.2) v3(4.7,46.3) v3(4.7,1.6) v3(4.8,44.9) v3(4.9,3) v3(63.1,2.9) v3(63.2,45.1) v3(63.3,46.4) v3(63.3,1.6) v3(63.7,4.1) v3(63.8,43.9) v3(64.8,4.8) v3(65,43.2) v3(66.3,43.3) v3(66.3,4.7)
